# Altium PCB PCB-Fuente.V01.R00.PcbDoc
Units mm, origin at the board's own origin, x right, y up, seen from the top; angles counter-clockwise.
Board outline 60 x 73 mm, 4 copper layers (Top Layer, Ground, Power, Bottom Layer), stack 1.576 mm thick; 78 components, 38 nets, 217 pads, 1007 vias.
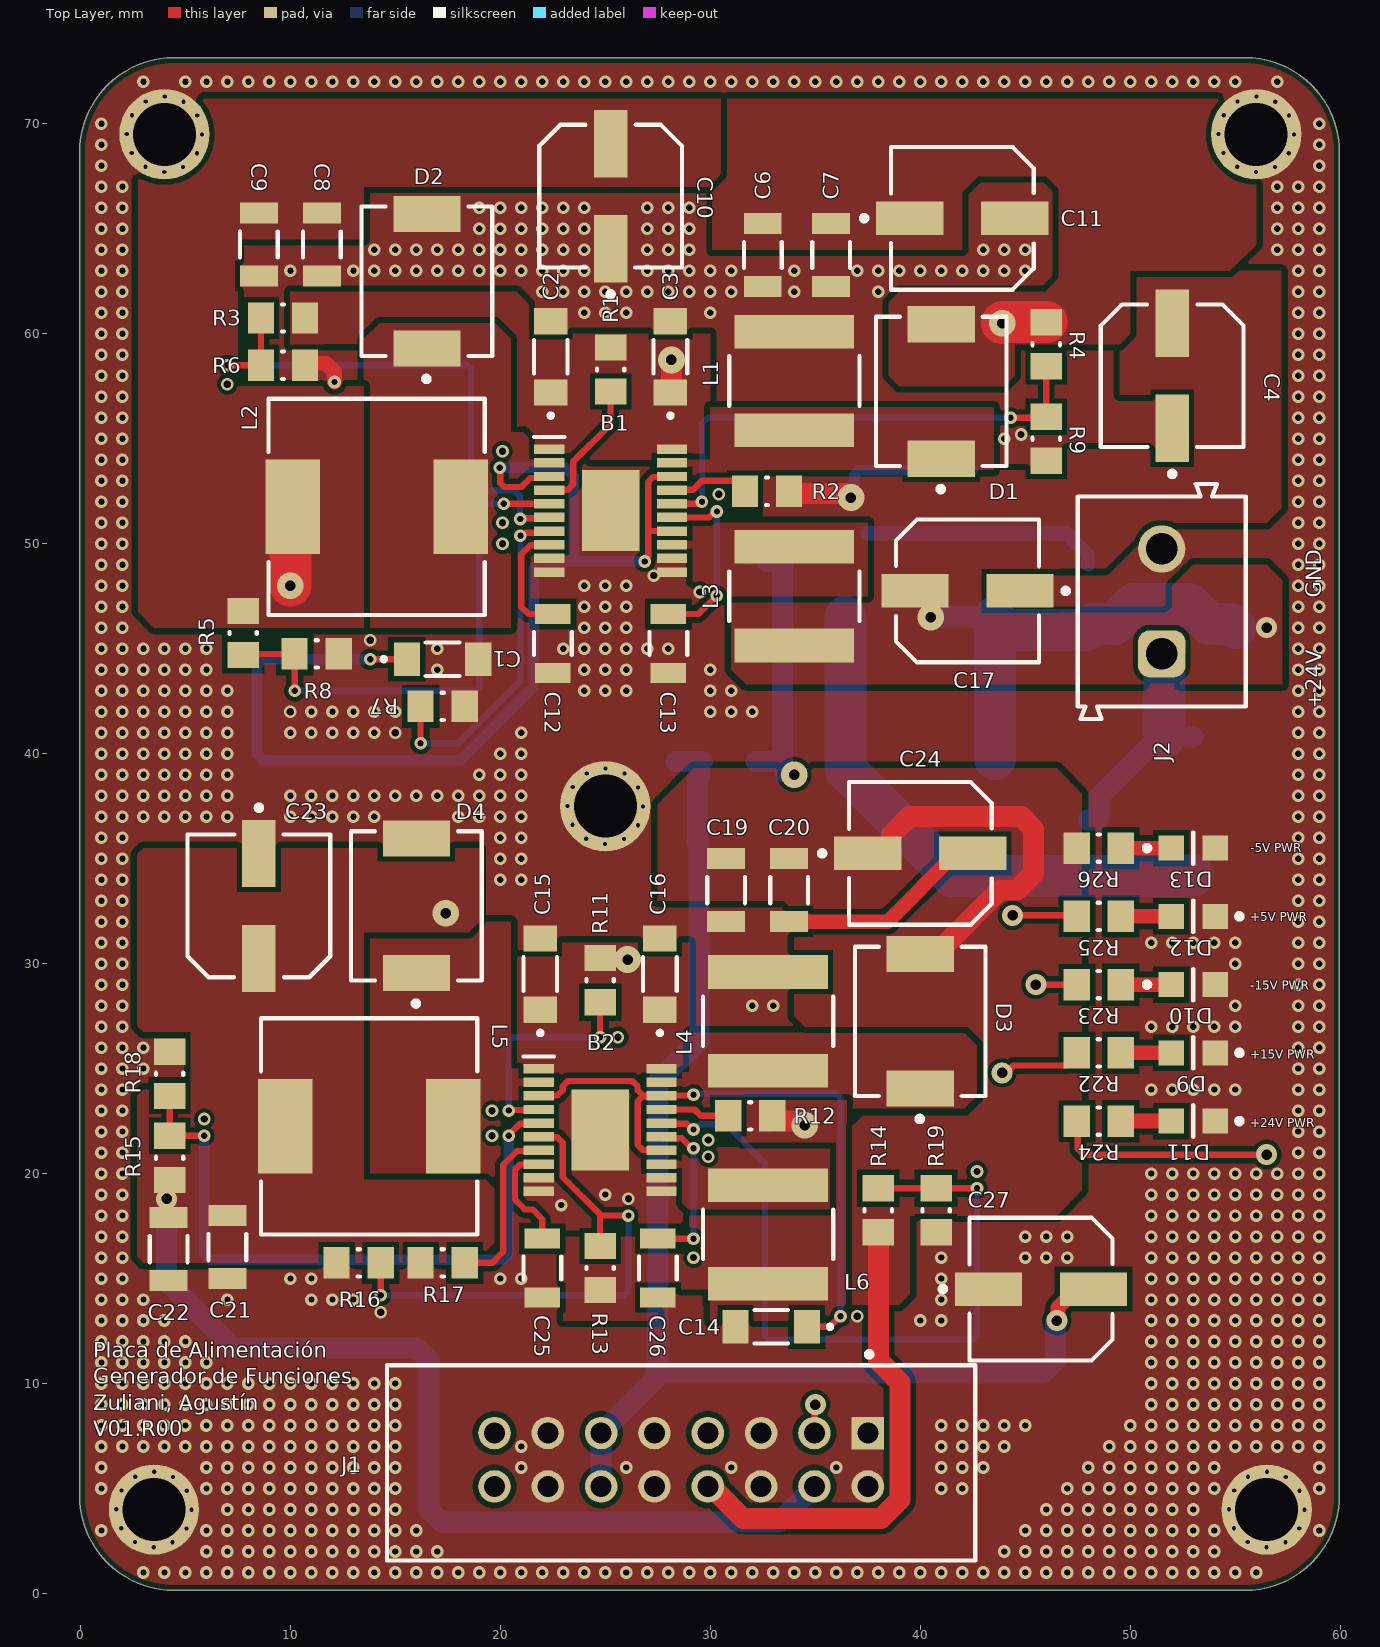
[diagram p0: Top Layer view]
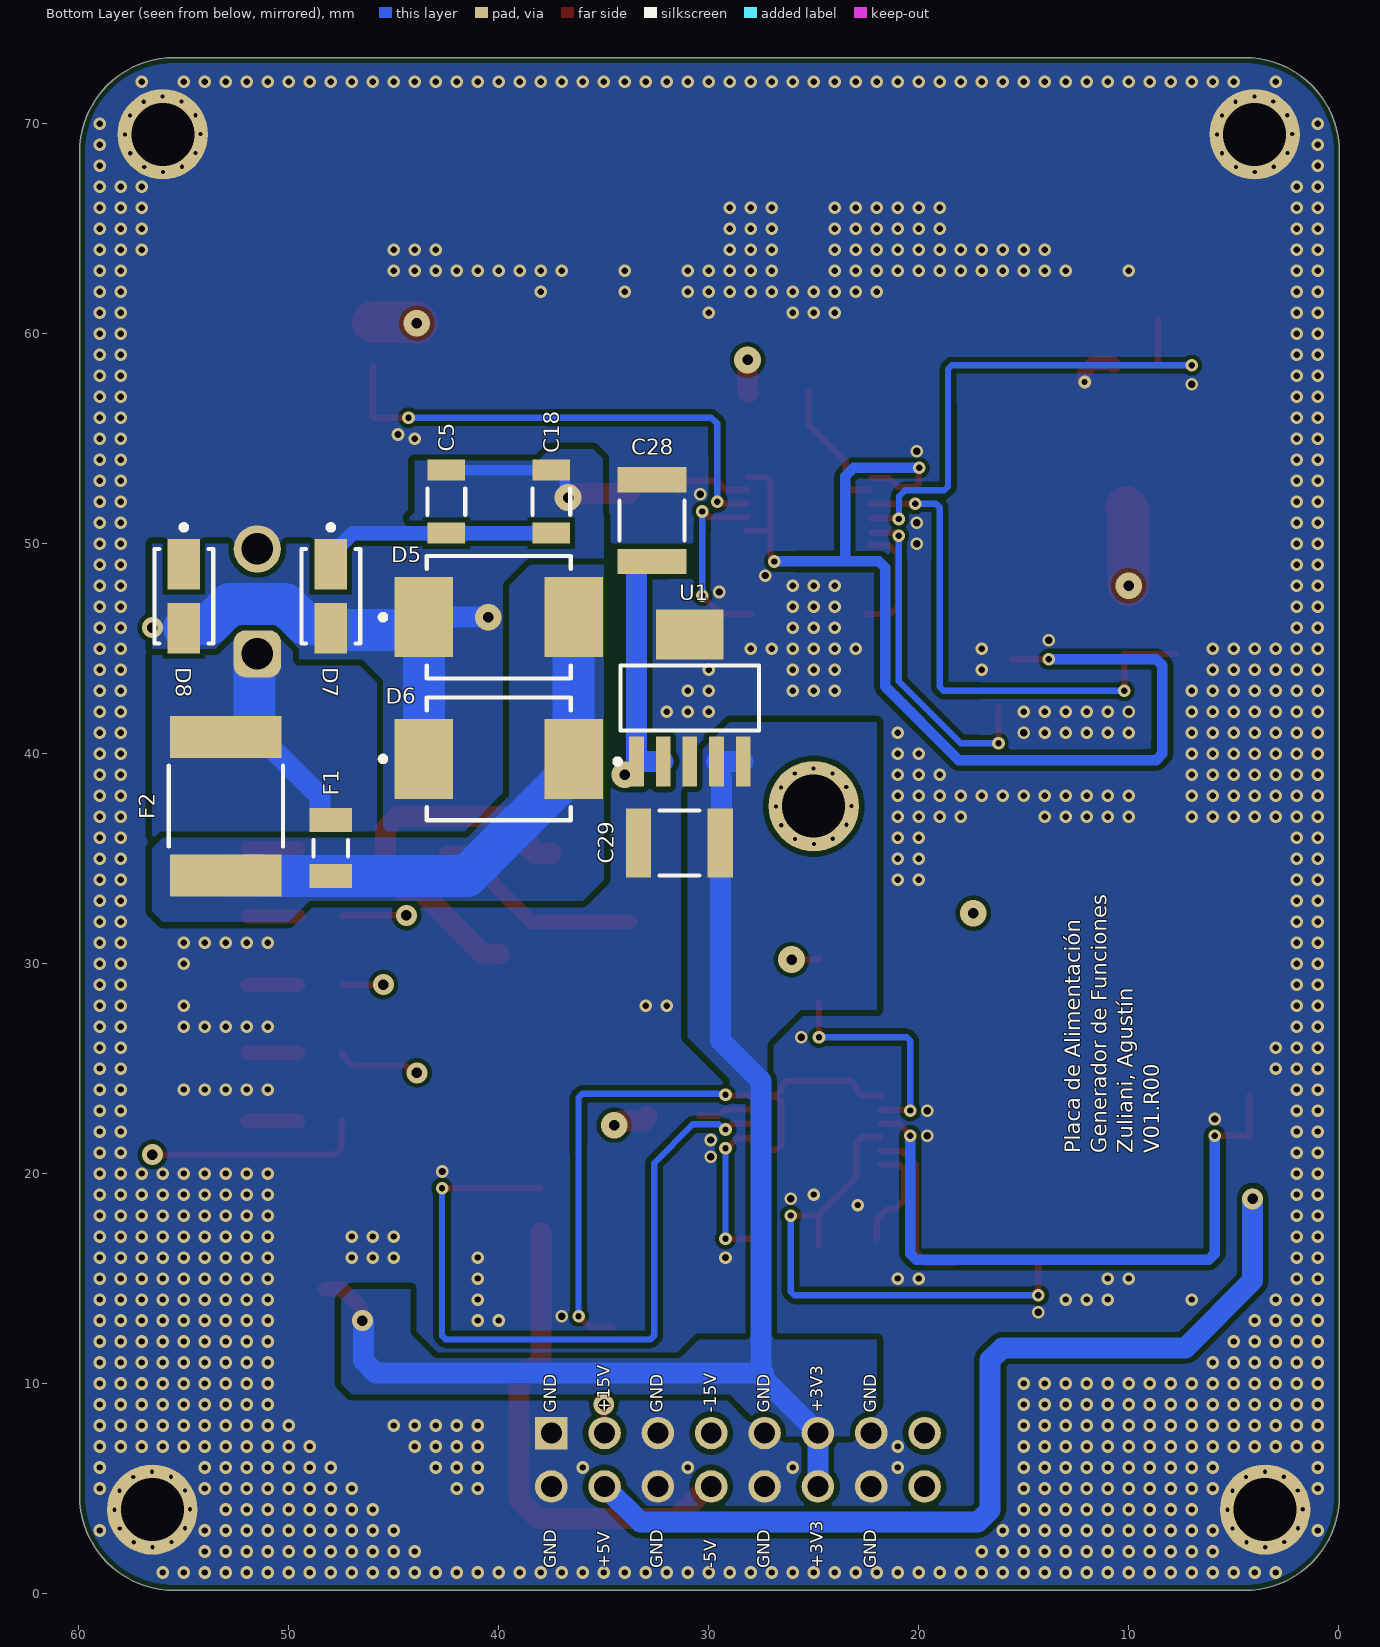
[diagram p1: Bottom Layer view, seen from below]
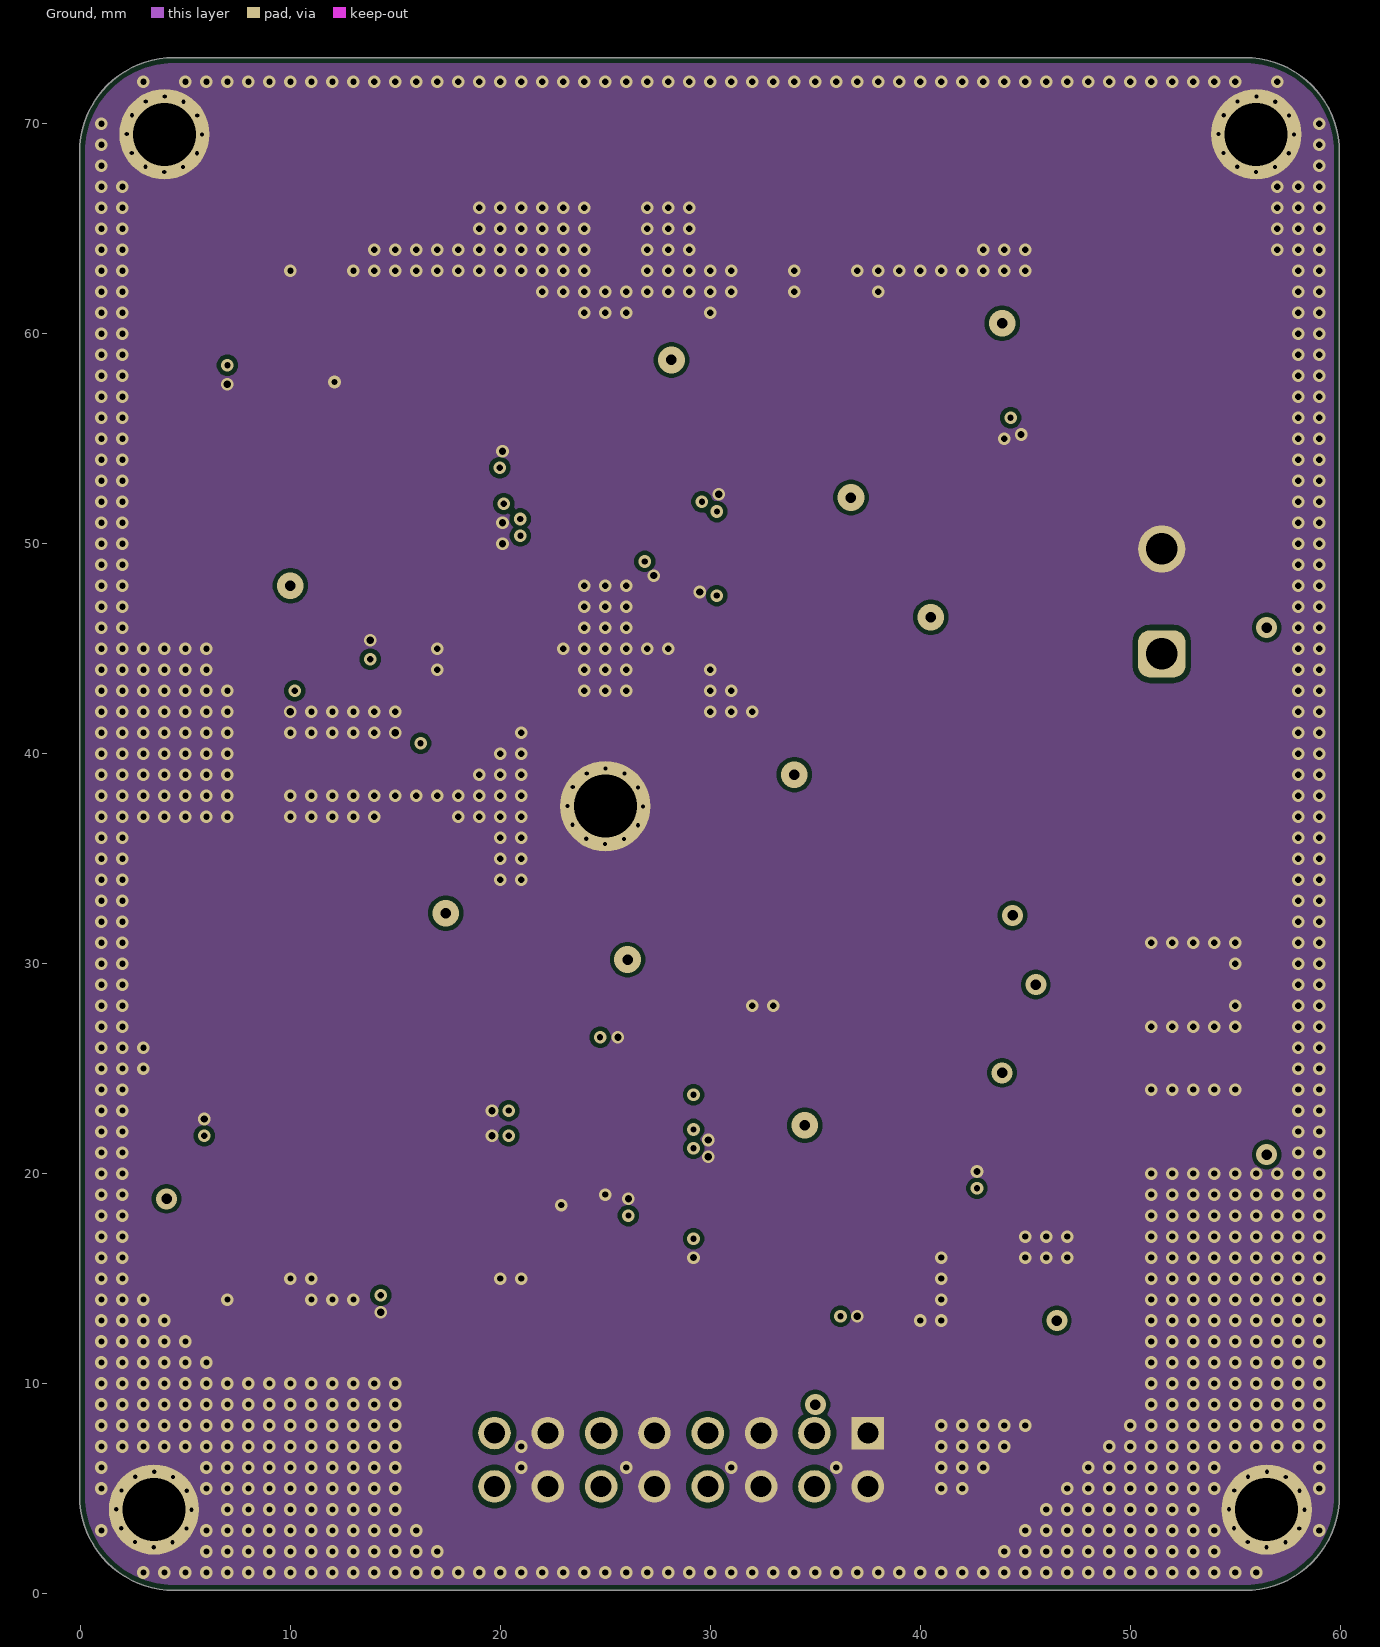
[diagram p2: Ground]
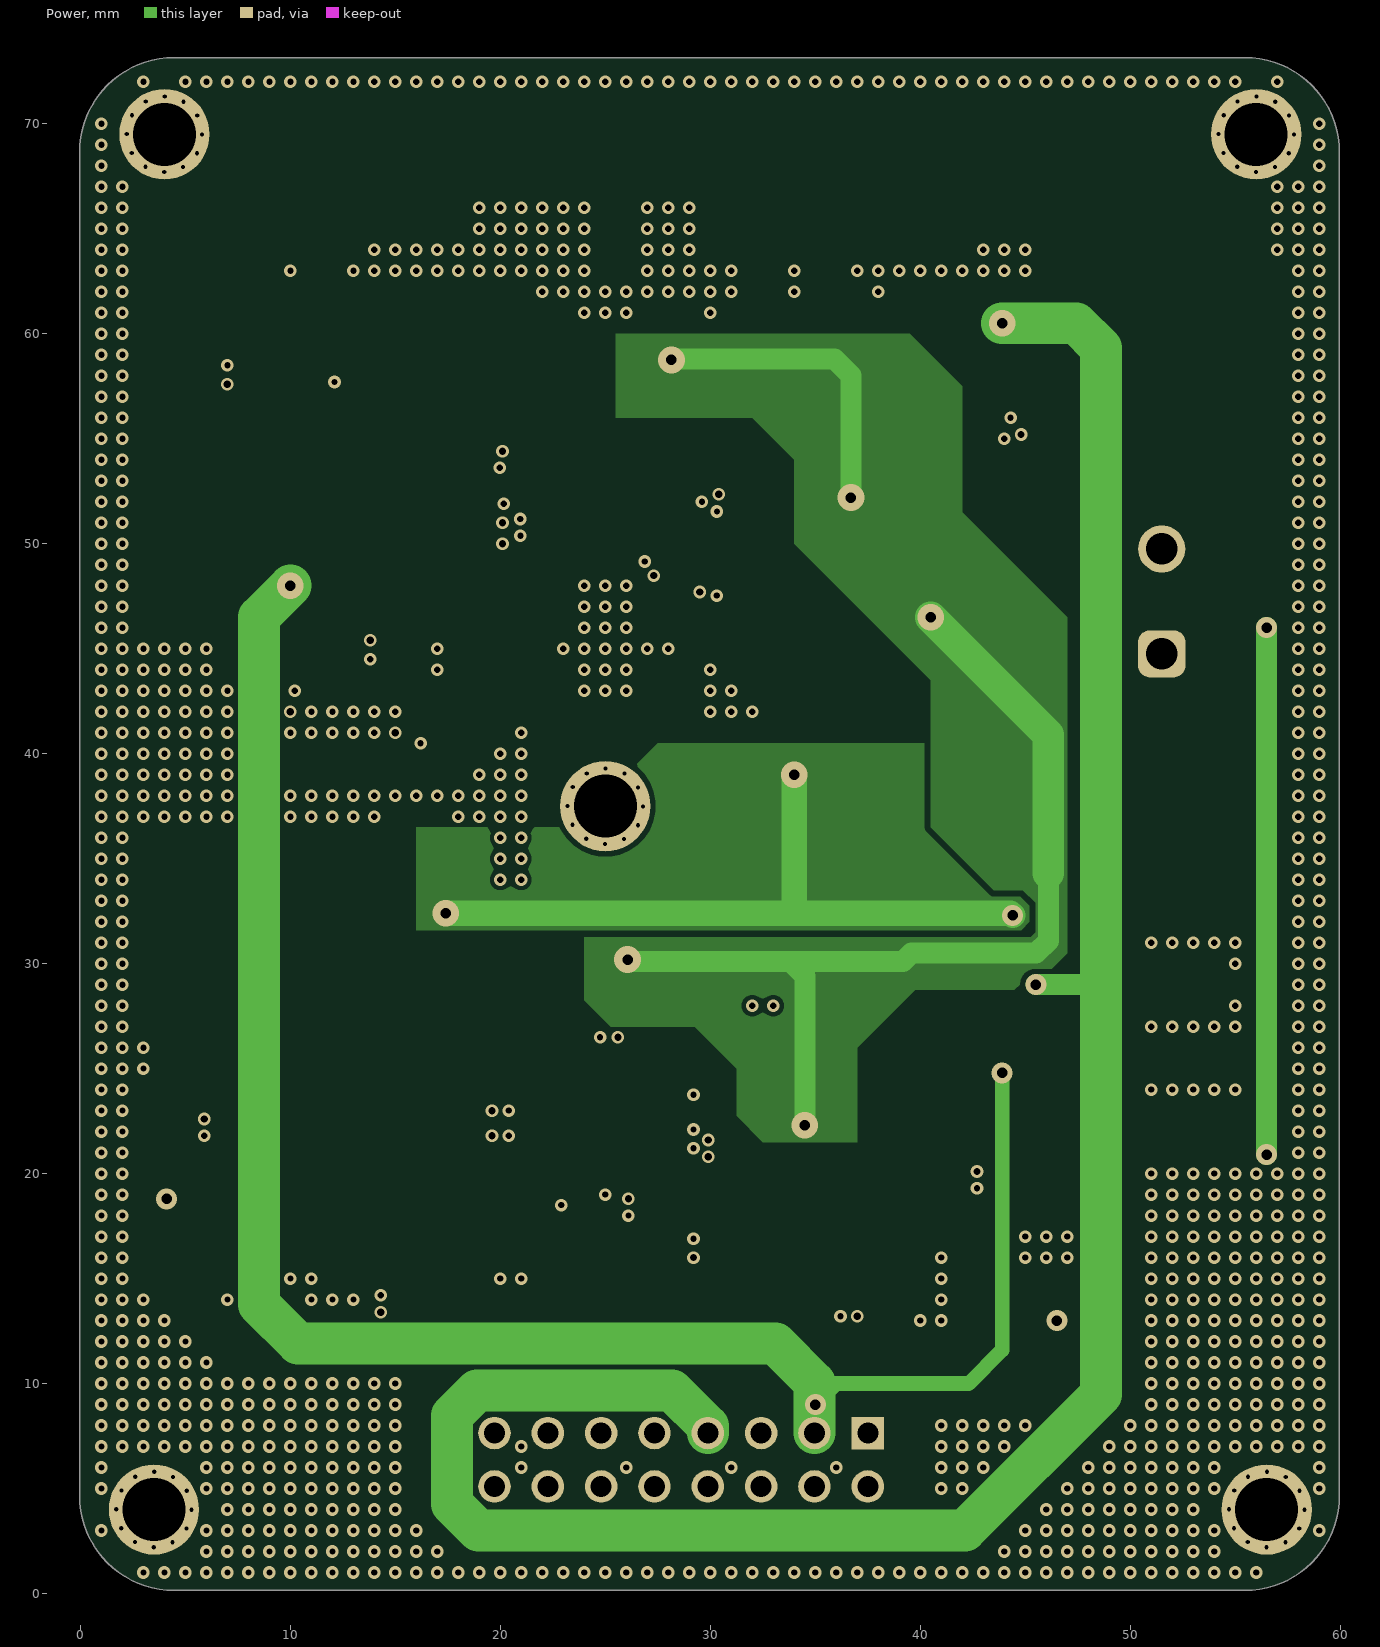
[diagram p3: Power]
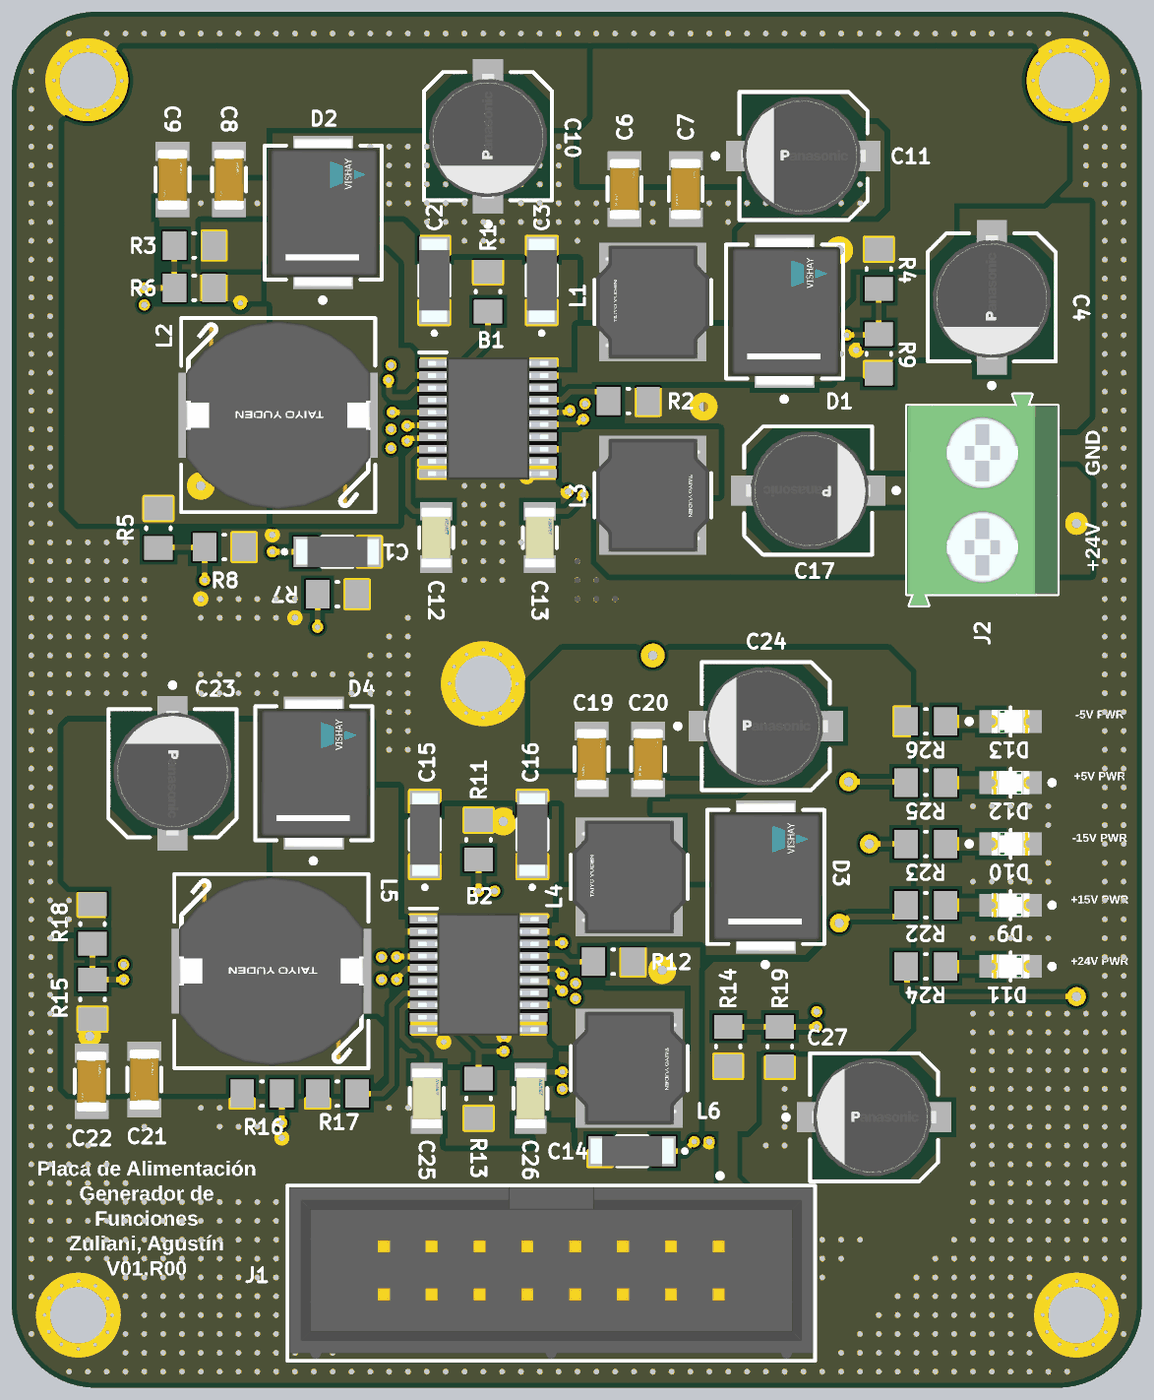
[diagram p4: 3D render of the assembled board from above, using the file's embedded part models]

## Layer stack, top to bottom
Top Solder: solder mask 0.0102, Solder Resist, Dk 3.5
Top Layer: signal copper 0.035
Dielectric 2: prepreg 0.203, PP-006, Dk 4.4
Ground: signal copper 0.035
Dielectric 1: dielectric 1.03, FR-4, Dk 4.6
Power: signal copper 0.035
Dielectric 3: prepreg 0.203, PP-006, Dk 4.4
Bottom Layer: signal copper 0.035
Bottom Solder: solder mask 0.0102, Solder Resist, Dk 3.5

## Board outline
-0.038,4.65 -0.038,68.65 cw(c4.462,68.65) 4.462,73.15 55.462,73.15 cw(c55.462,68.65) 59.962,68.65 59.962,4.65 cw(c55.462,4.65) 55.462,0.15 4.462,0.15 cw(c4.462,4.65)

## Design rules (kind name [scope] priority, off if disabled: settings)
BoardOutlineClearance [not (OnLayer('Top Overlay'))] p1: gap=0.254 ignorepadtopadclearanceinfootprint=FALSE except(0: Arc-SplitContinuation Track-SplitContinuation SMDPad-SplitContinuation THPad-SplitContinuation Via-SplitContinuation Fill-SplitContinuation Poly-SplitContinuation Region-SplitContinuation Text-SplitContinuation)
Clearance [All] p1: gap=0.254 ignorepadtopadclearanceinfootprint=FALSE except(0: Arc-Hole Track-Hole SMDPad-Hole THPad-Hole Via-Hole Fill-Hole Poly-Hole Region-Hole Text-Hole; 0.152: Arc-SMDPad Track-SMDPad SMDPad-SMDPad; 0.2: Arc-Arc Arc-Track Arc-Via Track-Track Track-Via SMDPad-Via THPad-Via Via-Via Via-Fill Via-Poly Via-Region; 0.3: Fill-Fill Fill-Poly Fill-Region Poly-Poly Poly-Region Region-Region)
HoleSize [All] p1: absolutevalues=TRUE maxlimit=5 minlimit=0.025 maxpercent=80.000 minpercent=20.000
HoleToHoleClearance [All] p1: gap=0.15 allowstackedmicrovias=TRUE
MinimumSolderMaskSliver [All] p1: minsoldermaskwidth=0
PolygonConnect [All] p1: connectstyle=Direct reliefconductorwidth=0.254 reliefentries=4 polygonreliefangle="90 Angle" airgapwidth=0.254
RoomDefinition Principal.V01.R00 [InComponentClass('Principal.V01.R00')] p1: confinementstyle=ConfineIn formatcopy=TRUE lockcomponents=FALSE outline 2,0.5 57,0.5 57,72.5 2,72.5
RoutingVias [All] p1: holewidth=0.711 width=1 viastyle="Through Hole" minholewidth=0.2 minwidth=0.4 maxholewidth=0.5 maxwidth=1.5
SilkToSilkClearance [All] p1: silktosilkclearance=0.1
SilkToSolderMaskClearance [IsPad] p1: minsilkscreentomaskgap=0.1 clearancetoexposedcopper=TRUE
SolderMaskExpansion [All] p1: expansion=0.102 istentingtop=FALSE
UnRoutedNet [All] p1: checkbadconnections=TRUE
Width [All] p1: maxlimit=2 minlimit=0.3 preferedwidth=0.5 minimp=50.000000 maximp=50.000000 favimp=50.000000
24 further rules are at their usual default settings.

## Components (designator, comment, footprint, x,y, rotation, side; value= is the part's Value field where it differs from the comment)
B1 "LT8471IFE#PBF" SOP65P640X120-21N 25.25,51.576 r0 top
B2 "LT8471IFE#PBF" SOP65P640X120-21N 24.75,22.076 r0 top
C1 "2.2uF 50V" MBASx31x 17.25,44.5 r0 top
C2 "2.2uF 50V" MBASx31x 22.4,58.9 r90 top
C3 "2.2uF 50V" MBASx31x 28.1,58.9 r90 top
C4 "47uF 35V" FP-FK-D-MFG 52,58 r90 top value=47uF
C5 "4.7uF 20V" FP-CC1206-1_25-MFG 42.5,52 r90 bottom value="1 uF"
C6 "4.7uF 20V" FP-CC1206-1_25-MFG 32.5,63.75 r270 top value="1 uF"
C7 "4.7uF 20V" FP-CC1206-1_25-MFG 35.75,63.75 r270 top value="1 uF"
C8 "4.7uF 20V" FP-CC1206-1_25-MFG 11.5,64.25 r90 top value="1 uF"
C9 "4.7uF 20V" FP-CC1206-1_25-MFG 8.5,64.25 r90 top value="1 uF"
C10 "47uF 35V" FP-FK-D-MFG 25.25,66.55 r90 top value=47uF
C11 "47uF 35V" FP-FK-D-MFG 42,65.5 r0 top value=47uF
C12 "100nF 50V" FP-C1206C-EB-MFG 22.5,45.25 r270 top value="0.10 μF"
C13 "100nF 50V" FP-C1206C-EB-MFG 28,45.25 r270 top value="0.10 μF"
C14 "2.2uF 50V" MBASx31x 32.9,12.7 r180 top
C15 "2.2uF 50V" MBASx31x 21.9,29.5 r90 top
C16 "2.2uF 50V" MBASx31x 27.6,29.5 r90 top
C17 "47uF 35V" FP-FK-D-MFG 42.25,47.75 r180 top value=47uF
C18 "4.7uF 20V" FP-CC1206-1_25-MFG 37.5,52 r90 bottom value="1 uF"
C19 "4.7uF 20V" FP-CC1206-1_25-MFG 30.75,33.5 r270 top value="1 uF"
C20 "4.7uF 20V" FP-CC1206-1_25-MFG 33.75,33.5 r270 top value="1 uF"
C21 "4.7uF 20V" FP-CC1206-1_25-MFG 7,16.5 r90 top value="1 uF"
C22 "4.7uF 20V" FP-CC1206-1_25-MFG 4.2,16.4 r90 top value="1 uF"
C23 "47uF 35V" FP-FK-D-MFG 8.5,32.75 r270 top value=47uF
C24 "47uF 35V" FP-FK-D-MFG 40,35.25 r0 top value=47uF
C25 "100nF 50V" FP-C1206C-EB-MFG 22,15.5 r270 top value="0.10 μF"
C26 "100nF 50V" FP-C1206C-EB-MFG 27.5,15.5 r270 top value="0.10 μF"
C27 "47uF 35V" FP-FK-D-MFG 45.75,14.5 r0 top value=47uF
C28 "10uF 25V" CAPC1812(4532)280_L 32.7,51.1 r270 bottom value=10uF
C29 "10uF 25V" CAPC1812(4532)280_L 31.4,35.75 r180 bottom value=10uF
D1 "SL43-E3/57T" FP-95402-MFG 41,57.25 r90 top
D2 "SL43" FP-95402-MFG 16.5,62.5 r90 top
D3 "SL43-E3/57T" FP-95402-MFG 40,27.25 r90 top
D4 "SL43" FP-95402-MFG 16,32.75 r90 top
D5 "MBRS360T3G" ONSC-SMC-2-403-03_V 40,46.5 r180 bottom
D6 "MBRS360T3G" ONSC-SMC-2-403-03_V 40,39.75 r180 bottom
D7 "SMAJ24CA" VISH-DO-214AC-2_N 48,47.5 r270 bottom
D8 "SMAJ24CA" VISH-DO-214AC-2_N 55,47.5 r270 bottom
D9 "PWR +15V" FP-SML-LX0805UWC-TR-MFG 53,25.75 r180 top
D10 "PWR +15V" FP-SML-LX0805UWC-TR-MFG 53,29 r0 top
D11 "PWR +15V" FP-SML-LX0805UWC-TR-MFG 53,22.5 r180 top
D12 "PWR +15V" FP-SML-LX0805UWC-TR-MFG 53,32.25 r180 top
D13 "PWR +15V" FP-SML-LX0805UWC-TR-MFG 53,35.5 r0 top
F1 "0468001.NR" FP-0468-MFG 48,35.5 r270 bottom value=0.079Ω
F2 "2920L110/60MR" FP-2920L-MFG 53,37.5 r270 bottom value=0.12-0.41Ω
J1 "IDC-PLACA CONTROL" FP-SBH11-PBPC-D08-ST-BK-MFG 28.61,6.22 r180 top
J2 "INPUT 24V" 691111710002 51.5,47.25 r90 top
L1 "15uH" FP-NR6045-MFG 34,57.75 r90 top
L2 "10uH" FP-NR10050-MFG 14.11,51.75 r180 top
L3 "15uH" FP-NR6045-MFG 34,47.5 r270 top
L4 "15uH" FP-NR6045-MFG 32.75,27.25 r90 top
L5 "10uH" FP-NR10050-MFG 13.75,22.25 r180 top
L6 "15uH" FP-NR6045-MFG 32.75,17.1 r270 top
R1 "100K 5%" RESC0805(2012)_M 25.25,58.3 r90 top value="124000.00 Ohm"
R2 "100K 5%" RESC0805(2012)_M 32.7,52.5 r180 top value="124000.00 Ohm"
R3 "68K7 1%" RESC0805(2012)_M 9.65,60.75 r0 top value="124000.00 Ohm"
R4 "180K 1%" RESC0805(2012)_M 46,59.5 r90 top value="124000.00 Ohm"
R5 "180K 1%" RESC0805(2012)_M 7.75,45.75 r90 top value="124000.00 Ohm"
R6 "4K75 1%" RESC0805(2012)_M 9.65,58.5 r180 top value="124000.00 Ohm"
R7 "170K 1%" RESC0805(2012)_M 17.25,42.25 r180 top value="124000.00 Ohm"
R8 "10K 1%" RESC0805(2012)_M 11.25,44.75 r180 top value="124000.00 Ohm"
R9 "10K 1%" RESC0805(2012)_M 46,55 r90 top value="124000.00 Ohm"
R11 "100K 5%" RESC0805(2012)_M 24.75,29.213 r90 top value="124000.00 Ohm"
R12 "100K 5%" RESC0805(2012)_M 31.9,22.75 r180 top value="124000.00 Ohm"
R13 "68K7 1%" RESC0805(2012)_M 24.75,15.5 r270 top value="124000.00 Ohm"
R14 "180K 1%" RESC0805(2012)_M 38,18.25 r270 top value="124000.00 Ohm"
R15 "316K 1%" RESC0805(2012)_M 4.25,20.75 r270 top value="124000.00 Ohm"
R16 "4K75 1%" RESC0805(2012)_M 13.25,15.75 r0 top value="124000.00 Ohm"
R17 "170K 1%" RESC0805(2012)_M 17.25,15.75 r0 top value="124000.00 Ohm"
R18 "59K 1%" RESC0805(2012)_M 4.25,24.75 r270 top value="124000.00 Ohm"
R19 "10K 1%" RESC0805(2012)_M 40.75,18.25 r90 top value="124000.00 Ohm"
R22 "1K2 5%" RESC0805(2012)_M 48.5,25.75 r0 top value="124000.00 Ohm"
R23 "1K2 5%" RESC0805(2012)_M 48.5,29 r0 top value="124000.00 Ohm"
R24 "2K2 5%" RESC0805(2012)_M 48.5,22.5 r0 top value="124000.00 Ohm"
R25 "1K2 5%" RESC0805(2012)_M 48.5,32.25 r0 top value="124000.00 Ohm"
R26 "1K2 5%" RESC0805(2012)_M 48.5,35.5 r0 top value="124000.00 Ohm"
U1 "TPS7A4533DCQT" DCQ0006A_M 30.9,42.65 r90 bottom

## Footprints (in the part's own frame and the unit in brackets; to place one, negate y for a bottom-side part, rotate by r counter-clockwise, add the part's x,y. Pads: shape width x height; smd on the part's side, far side on the other; paste and mask are expansions set on the pad)
691111710002 [mm] "5,00mm - modular - green - Horizontal entry with pressure clamp - 10,0mm height - 02p"
  rrect50% 2.25x2.25 hole 1.5: 1(-2.5,0)
  round 2.25 hole 1.5: 2(2.5,0)
  silkscreen extent -5.6,-4 5.6,4, body extent -5.6,-4 5.6,4, height 11.05
CAPC1812(4532)280_L [mm] "Chip Capacitor, Body 4.5x3.2mm, Height 2.8mm, IPC High Density"
  rect 1.2x3.3 smd: 1(-1.95,0) 2(1.95,0)
  silkscreen extent -0.95,-1.55 0.95,1.55, body extent -2.4,-1.7 2.4,1.7, height 2.8
DCQ0006A_M [mm] "SOT223, 6-Leads, Body 6.55x3.55mm, Pitch 1.27mm, IPC Low Density"
  rrect14% 2.4x0.7 smd: 1(-3.025,2.54) 2(-3.025,1.27) 3(-3.025,0) 4(-3.025,-1.27) 5(-3.025,-2.54)
  rrect4% 2.4x3.2 smd: 6(3.025,0)
  silkscreen extent -3.15,-3.3 1.55,3.57, body extent -3.48,-3.25 3.48,3.25, height 1.64
FP-0468-MFG [mil]
  rect 45x80 smd paste+0 mask+0: 1(-52.5,0) 2(52.5,0)
  silkscreen extent -15,-32 15,32, body extent -63,-30 63,30, height 23
FP-2920L-MFG [mm]
  rect 2x5.3 smd paste+0 mask+0: 1(-3.3,0) 2(3.3,0)
  silkscreen extent -1.92,-2.72 1.92,2.72, body extent -3.68,-2.56 3.68,2.56, height 2
FP-95402-MFG [mm]
  rect 1.72x3.2 smd paste+0 mask+0: 1(-3.205,0) 2(3.205,0)
  silkscreen extent -4.77,-3.11 3.55,3.11, body extent -4.17,-3.21 4.17,3.21, height 0.25
FP-C1206C-EB-MFG [mm]
  rect 0.95x1.7 smd paste+0 mask+0: 1(-1.4,0) 2(1.4,0)
  silkscreen extent -0.55,-0.9 0.55,0.9, body extent -2,-1 2,1, height 0.25
FP-CC1206-1_25-MFG [mm]
  rect 1x1.8 smd paste+0 mask+0: 1(-1.5,0) 2(1.5,0)
  silkscreen extent -0.63,-0.9 0.63,0.9, body extent -1.6,-0.8 1.6,0.8, height 1.45
FP-FK-D-MFG [mm]
  rect 3.2x1.6 smd paste+0 mask+0: 1(-2.5,0) 2(2.5,0)
  silkscreen extent -4.8,-3.4 3.4,3.4, body extent -4.2,-3.5 4.2,3.5, height 0.25
FP-NR6045-MFG [mm]
  rect 1.6x5.7 smd paste+0 mask+0: 1(-2.35,0) 2(2.35,0)
  silkscreen extent -1.17,-3.1 1.17,3.1, body extent -3.25,-3.2 3.25,3.2, height 0.25
FP-NR10050-MFG [mm]
  rect 2.6x4.5 smd paste+0 mask+0: 1(-4,0) 2(4,0)
  silkscreen extent -5.15,-5.15 5.15,5.15, body extent -5.4,-5.25 5.4,5.25, height 0.25
FP-SBH11-PBPC-D08-ST-BK-MFG [mm]
  rect 1.55x1.55 hole 1 paste-2539.97 mask+0: 1(-8.89,-1.42)
  round 1.55 hole 1 paste-2539.97 mask+0: 2(-8.89,1.12) 3(-6.35,-1.42) 4(-6.35,1.12) 5(-3.81,-1.42) 6(-3.81,1.12) 7(-1.27,-1.42) 8(-1.27,1.12) 9(1.27,-1.42) 10(1.27,1.12) 11(3.81,-1.42) 12(3.81,1.12) 13(6.35,-1.42) 14(6.35,1.12) 15(8.89,-1.42) 16(8.89,1.12)
  silkscreen extent -14.01,-5.29 14.01,4.65, body extent -14.11,-4.75 14.11,4.75, height 0.25
FP-SML-LX0805UWC-TR-MFG [mm]
  rect 1.2x1.2 smd paste+0 mask+0: 1(-1.05,0) 2(1.05,0)
  silkscreen extent -2.33,-0.75 0,0.75, body extent -1.75,-0.85 1.75,0.85, height 0.25
MBASx31x [mm]
  rect 1.25x1.6 smd: 1(-1.7,0) 2(1.7,0)
  silkscreen extent -2.9,-0.8 0.8,0.8, body extent -2.2,-0.8 2.2,0.8, height 1.7
ONSC-SMC-2-403-03_V [mil] "Molded, 2-Leads, Body 6.86x5.84mm"
  rect 110x150 smd: 1(-140.49,0) 2(140.49,0)
  silkscreen extent -222,-115 135,115, body extent -135,-115 135,115, height 99
RESC0805(2012)_M [mm] "Chip Resistor, Body 2.0x1.3mm, IPC Low Density"
  rect 1.25x1.5 smd: 1(-1.05,0) 2(1.05,0)
  silkscreen extent -0.05,-0.65 0.05,0.65, body extent -1.1,-0.67 1.1,0.67, height 0.7
SOP65P640X120-21N [mm]
  rect 1.45x0.45 smd: 1(-2.925,2.925) 2(-2.925,2.275) 3(-2.925,1.625) 4(-2.925,0.975) 5(-2.925,0.325) 6(-2.925,-0.325) 7(-2.925,-0.975) 8(-2.925,-1.625) 9(-2.925,-2.275) 10(-2.925,-2.925) 11(2.925,-2.925) 12(2.925,-2.275) 13(2.925,-1.625) 14(2.925,-0.975) 15(2.925,-0.325) 16(2.925,0.325) 17(2.925,0.975) 18(2.925,1.625) 19(2.925,2.275) 20(2.925,2.925)
  rect 2.74x3.86 smd: 21(0,0)
  silkscreen extent -3.65,3.5 -2.2,3.5, body extent -3.2,-3.25 3.2,3.25, height 1.2
VISH-DO-214AC-2_N [mm] "DO-214AC, 2-Leads, Body 4.5x2.79mm, IPC Medium Density"
  rect 2.4x1.55 smd: 1(-1.525,0) 2(1.525,0)
  silkscreen extent -3.4,-1.4 2.25,1.4, body extent -2.25,-1.4 2.25,1.39, height 2.29

## Part data
B1 B2: "DC/DC CONVERTER, MULTITOPOLOGY, 50V, TSSOP-20; Supply Voltage:50V; No. of Step-Down DC - DC Converters:2; No. of LDO Regulators:-; No. of Regulated Outputs:2; Digital IC Case:TSSOP; No. of Pins:20Pins; Operating Temperature Min:-40CRoHS Compliant: Yes", Manufacturer_Name="Analog Devices", Mouser Part Number=584-LT8471IFE#PBF, Datasheet Link=https://www.analog.com/media/en/technical-documentation/data-sheets/8471fd.pdf, Geometry.Height=1.2mm, Manufacturer_Part_Number=LT8471IFE#PBF, Mouser Price/Stock=https://www.mouser.co.uk/ProductDetail/Analog-Devices/LT8471IFEPBF?qs=hVkxg5c3xu%2FiDctk9AXMtQ%3D%3D
C1 C2 C3 C14 C15 C16: library part MBASU31LSB7225KTNA01, "Capacitor", Manufacturer_Name="TAIYO YUDEN", Datasheet Link=https://ds.yuden.co.jp/TYCOMPAS/or/detail?pn=MBASU31LSB7225KTNA01, Height=1.6mm, Manufacturer_Part_Number=MBASU31LSB7225KTNA01
C4 C10 C11 C17 C23 C24 C27: library part CMP-05427-000002-1, "CAP ALUM 47UF 20% 35V SMD", Capacitance=47uF, Leakage Current=16.45uA, Manufacturer=Panasonic, Manufacturer Part Number=EEE-FK1V470P, Package=FK-D, Ripple Current=240mA, Temperature="-55°C to +105°C", Temperature Range High=+105°C, Temperature Range Low=-55°C, Tolerance=20%, Voltage Rating=35V, Automotive=Yes, Automotive Grade="Grade 2", Category=Cap, ComponentLink2Description=Datasheet, ComponentLink2URL=https://industrial.panasonic.com/cdbs/www-data/pdf/RDE0000/ABA0000C1181.pdf, Device Class L1="Passive Components", Device Class L2=Capacitors, Device Class L3="Aluminum Electrolytic Capacitors", Digikey Description="CAP ALUM 47UF 20% 35V SMD", Dissipation Factor=12%, Esr=0.36Ω, Height=6.1mm, Lead Free=Yes, Life=2000Hours, Material=Aluminum, Mouser Description="Capacitor Aluminum Electrolytic 47uF 35 Volt 20% (6.3 X 5.8mm) Surface Mount 240mA 2000h 105C Automotive", Octopart=https://octopart.com/eeefk1v470p-panasonic-4642848, RoHS=TRUE
C5 C6 C7 C8 C9 C18 C19 C20 C21 C22: library part CMP-03422-001171-1, "CAP CER 1UF 10V X7R 1206", Capacitance="1 uF", Manufacturer=Yageo, Manufacturer Part Number=CC1206KKX7R6BB105, Package=CC1206-1.25, Temperature="-55°C to +125°C", Temperature Characteristic=X7R, Temperature Coefficient=15%, Temperature Range High=+125°C, Temperature Range Low=-55°C, Tolerance=0.1, Voltage Rating="10 V", Automotive=No, Automotive Grade=NA, Category=Cap, ComponentLink2Description=Datasheet, ComponentLink2URL=http://www.yageo.com/documents/recent/UPY-NP0X7R_HV_1KV-to-3KV_11.pdf, Device Class L1="Passive Components", Device Class L2=Capacitors, Device Class L3="Ceramic Capacitors", Digikey Description="CAP CER 1UF 10V X7R 1206", Footprint Url=http://www.yageo.com/exep/pages/download/literatures/UPY-C_GEN_24.pdf, Height=1.45mm, Lead Free=Yes, Material=Ceramic, Mouser Description="Multilayer Ceramic Capacitors MLCC - SMD/SMT 1.0uF 10V X7R 10%", Octopart=https://octopart.com/cc1206kkx7r6bb105-yageo-21769912, RoHS=TRUE
C12 C13 C25 C26: library part CMP-03020-005759-1, "CAP CER 0.1UF 50V X7R 1206", Capacitance="0.10 μF", Manufacturer=KEMET, Manufacturer Part Number=C1206C104K5RACAUTO, Package=C1206C-EB, Temperature="-55°C to +150°C", Temperature Characteristic=X7R, Temperature Coefficient=15%, Temperature Range High=+150°C, Temperature Range Low=-55°C, Tolerance=0.1, Voltage Rating="50 V", Automotive=Yes, Automotive Grade="Grade 0", Category=Cap, ComponentLink2Description=Datasheet, ComponentLink2URL=https://content.kemet.com/datasheets/KEM_C1007_X8R_ULTRA_150C_SMD.pdf, Device Class L1="Passive Components", Device Class L2=Capacitors, Device Class L3="Ceramic Capacitors", Digikey Description="CAP CER 0.1UF 50V X7R 1206", Height=0.88mm, Ipc Land Pattern Name=CAPC320160X78, Lead Free=Yes, Material=Ceramic, Mouser Description="Multilayer Ceramic Capacitors MLCC - SMD/SMT 0.1uF 50volts 10% X7R AUTO", Octopart=https://octopart.com/c1206c104k5racauto-kemet-12595586, RoHS=TRUE
C28 C29: library part CMP-1040-01657-2, "CAP 10uF 25V ±20% 1812 (4532 Metric) Thickness 2.8mm SMD", Case-EIA=1812, Case-Metric=4532, Rated Voltage="25 V", Tolerance=Â±20%, Max Thickness="2.8 mm", Technology=SMT
D1 D2 D3 D4: library part CMP-02539-000070-1, "DIODE SCHOTTKY 30V 4A DO214AB", Average Rectified Current=4A, Case/Package=DO-214AB, Forward Current=8A, Forward Voltage=470mV, Max Forward Surge Current (Ifsm)=150A, Max Operating Temperature=125°C, Max Repetitive Reverse Voltage (Vrrm)=30V, Max Reverse Current=500uA, Min Operating Temperature=-55°C, Package Quantity=1, Current Rating=4A, Element Configuration=Single, Height=0.095inch, Lead Free="Lead Free", Length=0.279inch, Max Reverse Voltage (DC)=30V, Mount="Surface Mount", Number of Pins=2, Output Current=4A, Packaging="Tape and Reel", Peak Non-Repetitive Surge Current=150A, Polarity=Standard, Voltage Rating (DC)=30V, Width=0.245inch
D5 D6: library part CMP-1055-00394-1, "Schottky Power Rectifier, 2-Pin SMC, Pb-Free, Tape and Reel", Manufacturer="On Semiconductor", ComponentLink1Description="Manufacturer URL", ComponentLink1URL=http://www.onsemi.com/, ComponentLink2Description=Datasheet, ComponentLink2URL=http://www.onsemi.cn/pub_link/Collateral/MBRS360T3-D.PDF, ComponentLink3Description="Package Specification", ComponentLink3URL=http://www.onsemi.com/pub_link/Collateral/403-03.PDF, Configuration=Single, DatasheetVersion="Rev. 8", IFSM Max (A)=125, Mounting Technology="Surface Mount", PackageDescription="2-Pin Small Molded Package, J-Bend Lead, Body 5.845 x 6.855 mm", PackageReference=SMC-2-403-03, PackageVersion="Rev. E, 08/2005", Packing="Tape and Reel", PartNumber=MBRS360T3G, RoHS=TRUE
D7 D8: library part CMP-0548-00269-2, "Transient Voltage Suppressor, 6.40 to 231 V, 24 V Stand-off Voltage, Bi-Directional, -55 to 155 degC, 2-pin DO-214AC, Pb-Free, Tape and Reel", Manufacturer="Vishay Semiconductor", Operating Junction and Storage Temperature Range="-55 to 150 degC", PartNumber=SMAJ24CA-E3/5A, ComponentLink1Description="Manufacturer URL", ComponentLink1URL=http://www.vishay.com/, ComponentLink2Description=Datasheet, ComponentLink2URL=http://www.vishay.com/docs/88390/smaj50a.pdf, ComponentLink3Description="Package Specification", ComponentLink3URL=http://www.vishay.com/docs/88390/smaj50a.pdf, DatasheetVersion=12/8/2013, ID (uA)=2, IFSM="40 A", Mounting Technology="Surface Mount", PackageDescription="2-Pin DO-214AC (SMA), Body 4.245 x 2.665 mm", PackageReference=DO-214AC-2, Packing="Tape and Reel", PPPM (W)="400, 300", RoHS=TRUE, VBR Bi-Directional (V)="6.4 to 231", VWM (V)=24
D9 D10 D11 D12 D13: library part CMP-00229-00139794-1, "SML-LX0805UWC-TR White LED, 0805 Diffused, Rectangle Lens SMD package", Case/Package=0805, Forward Current=20mA, Forward Voltage=3.5V, Illumination Color=White, Lens Color="Clear, Yellow", Max Operating Temperature=85°C, Min Operating Temperature=-40°C, Power Rating=120mW, Approvals="CSA, UL", Luminous Intensity=150mcd, Mount="Surface Mount", NexarPartId=139794, Number of LEDs=1, RoHS=Compliant, Viewing Angle=120°
F1: library part CMP-2000-05753-2, "FUSE BOARD MNT 1A 63VAC/VDC 1206", Fuse Current=1A, Fuse Interrupt Ac Current=50A, Fuse Voltage Drop=94.7mV, Manufacturer=Littelfuse, Max Fuse Ac Voltage=63V, Package=0468, Resistance=0.079Ω, Temperature="-55°C to +90°C", Temperature Range High=+90°C, Temperature Range Low=-55°C, Automotive=No, Category=Fuse, ComponentLink2Description=Datasheet, ComponentLink2URL=https://m.littelfuse.com/~/media/electronics/datasheets/fuses/littelfuse_fuse_468_datasheet.pdf.pdf, Device Class L1="Circuit Protection", Device Class L2=Fuses, Device Class L3=unset, Digikey Description="FUSE BOARD MNT 1A 63VAC/VDC 1206", Fuse Blow Speed=Slow, Fuse I2T=0.127A2Sec, Fuse Interrupt Dc Current=50A, Height=0.762mm, Lead Free=Yes, Manufacturer Part Number=0468001.NR, Max Fuse Dc Voltage=63V, Mouser Description="Surface Mount Fuses 1A Slo-Blo", Octopart=https://octopart.com/0468001.nr-littelfuse-566477, RoHS=TRUE, Voltage Rating=63V
F2: library part CMP-08606-000028-1, "PTC RESET FUSE 60V 1.1A 2920", Ambient Temperature Range High=+85°C, Ambient Temperature Range Low=-40°C, Current Rating=20A, Hold Current=1.1A, Manufacturer=Littelfuse, Package=2920L, Resistance=0.12-0.41Ω, Temperature="-40°C to +85°C", Trip Current=2.2A, Voltage Rating=60V, Automotive=No, Category=Fuse, ComponentLink2Description=Datasheet, ComponentLink2URL=https://m.littelfuse.com/~/media/electronics/datasheets/resettable_ptcs/littelfuse_ptc_2920l_datasheet.pdf.pdf, Device Class L1="Circuit Protection", Device Class L2="PTC Resettable Fuses", Device Class L3=unset, Digikey Description="PTC RESET FUSE 60V 1.1A 2920", Height=2mm, Lead Free=Yes, Manufacturer Part Number=2920L110/60MR, Octopart=https://octopart.com/2920l110%2F60mr-littelfuse-75250824, RoHS=TRUE, Temperature Range High=+85°C, Temperature Range Low=-40°C, Trip Time=0.5s
J1: library part CMP-25680-000019-1, "CONN HEADER VERT 16POS 2.54MM", Current Rating=3A, Manufacturer=Sullins, Manufacturer Part Number=SBH11-PBPC-D08-ST-BK, Package=0, Temperature="-40°C to +105°C", Temperature Range High=+105°C, Temperature Range Low=-40°C, Automotive=No, Category=Conn, ComponentLink2Description=Datasheet, ComponentLink2URL=https://drawings-pdf.s3.amazonaws.com/11091.pdf, Conn Gender=Male, Conn Orientation=Straight, Contact Material=Gold,Nickel, Device Class L1=Connectors, Device Class L2="Headers and Wire Housings", Device Class L3=unset, Digikey Description="CONN HEADER VERT 16POS 2.54MM", Height=9.3mm, Lead Free=Yes, Number Of Contacts=16, Number Of Rows=2, Octopart=https://octopart.com/sbh11-pbpc-d08-st-bk-sullins-12270491, Pitch=2.54mm, RoHS=TRUE, Standoff Height=0.3mm
J2: library part CMP-1502-03262-3, "111 Series 5MM Pitch Straight, Pcb Terminal Block, Through Hole, 2 Way", Case/Package=J, Color=Green, Current Rating=8A, Max Operating Temperature=105°C, Min Operating Temperature=-40°C, Voltage Rating=300V, Contact Material=Brass, Contact Plating=Tin, Height=14mm, Housing Material=Nylon, Lead Pitch=5mm, Length=7.6mm, Number Of Contacts=2, Number of Levels=1, Number of Pins=2, Number of Positions Per Level=2, Packaging=Box, Pitch=5.0038mm, REACH SVHC=Unknown, RoHS=Compliant, Stripping Length=-6mm, Termination=Screw, Width=11.2mm, Wire/Cable Gauge=26AWG
L1 L3 L4 L6: library part CMP-14484-001063-1, "Shielded Wirewound Inductor 15uH 20% 2.3A 91mΩ SMD", Case/Package=6045, Current Rating=1.9A, DC Resistance (DCR)=91mR, Inductance Tolerance=20%, Max Operating Temperature=125°C, Min Operating Temperature=-25°C, Package Quantity=1500, Resistor Type=Wirewound, Saturation Current=2.5A, Self Resonant Frequency=10MHz, Test Frequency=100kHz, Core Material=Ferrite, Depth=6.2mm, Halogen Free="Halogen Free", Height=4.5mm, Height - Seated (Max)=0.177inch, Inductance=15uH, Lead Free="Lead Free", Lead Pitch=4.7mm, Length=6mm, Max DC Current=1.9A, Mount="Surface Mount", Number of Pins=2, Packaging="Tape and Reel", Radiation Hardening=No, RMS Current (Irms)=1.9A, RoHS Compliant=Yes, Series=NRS, Shielding=Shielded, Termination=SMD/SMT, Tolerance=20%, Width=6mm
L2 L5: library part CMP-14484-000424-1, "Inductor Power Shielded Wirewound 10uH 20% 100KHz Ferrite 4.1A 32.5mΩ DCR T/R", Case/Package=Nonstandard, Current Rating=4.1A, DC Resistance (DCR)=32.5mR, Inductance Tolerance=20%, Max DC Current=4.7A, Max Operating Temperature=105°C, Min Operating Temperature=-25°C, Package Quantity=500, Resistor Type=Wirewound, Self Resonant Frequency=15MHz, Test Frequency=100kHz, Core Material=Ferrite, Halogen Free="Halogen Free", Height=5mm, Height - Seated (Max)=0.197inch, Inductance=10uH, Lead Free="Lead Free", Length=0.394inch, Mount="Surface Mount", Number of Pins=2, Packaging="Tape and Reel", RMS Current (Irms)=4.1A, RoHS Compliant=Yes, Saturation Current=4.7A, Series=NR, Shielding=Shielded, Termination=SMD/SMT, Tolerance=20%, Width=0.386inch
R1 R2 R3 R4 R5 R6 R7 R8 R9 R11 R12 R13 R14 R15 R16 R17 R18 R19 R22 R23 R24 R25 R26: library part CMP-1013-00746-1, "124K 0.125W 1% 0805 (2012 Metric)  SMD", Case-EIA=0805, Case-Metric=2012, Power="0.125 W", Tolerance="1 %", Technology=SMT
U1: library part CMP-0395-00359-2, "Single Output Fast Transient Response LDO, 1.5 A, Fixed 3.3 V Output, 2.1 to 20 V Input, 6-pin SOT-223 (DCQ), -40 to 125 degC, Green (RoHS & no Sb/Br)", Manufacturer="Texas Instruments", Accuracy(%)=1, ComponentLink1Description="Manufacturer URL", ComponentLink1URL=http://www.ti.com/, ComponentLink2Description=Datasheet, ComponentLink2URL=http://www.ti.com/general/docs/lit/getliterature.tsp?genericPartNumber=TPS7A4533&fileType=pdf, ComponentLink3Description="Package Specification", ComponentLink3URL=http://www.ti.com/litv/pdf/mpds098c, DatasheetVersion=SLVS720D, Eco-Plan="Green (RoHS & no Sb/Br)", Fixed Output Options(V)=3.3, Iout(Max)(A)=1.5, Iq(Typ)(mA)=1, Mounting Technology="Surface Mount", PackageDescription="6-Pin Plastic Small Outline, Body 3.5 x 6.5 mm, Pitch 1.27 mm", PackageReference=DCQ0006A, PackageVersion=4202109/D, PartNumber=TPS7A4533DCQT, SubFamily="Single Channel LDO", Vdo(Typ)(mV)=300, Vin(Max)(V)=20, Vin(Min)(V)=2.1, Vout Adj(Max)(V)=3.3, Vout Adj(Min)(V)=3.3

## Free pads (board coordinates)
  round 4.3 hole 3: 1(3.5,4) 1(4,69.5) 1(25,37.5) 1(56,69.5) 1(56.5,4)

## Via types
v1: diameter 0.6, hole 0.3, Top Layer to Bottom Layer, tented both sides, 881 vias
v2: diameter 0.4, hole 0.2, Top Layer to Bottom Layer, 60 vias
v3: diameter 0.6, hole 0.3, Top Layer to Bottom Layer, 27 vias
v4: diameter 0.6, hole 0.35, Top Layer to Bottom Layer, 22 vias
v5: diameter 1.27, hole 0.5, Top Layer to Bottom Layer, 9 vias
v6: diameter 1, hole 0.5, Top Layer to Bottom Layer, 8 vias

## Nets (pads, with @x,y where several pads share a name; then routed paths per layer and width w, separated by ;. In a path a pad name is that pad's centre, name@x,y a point inside that pad or via, vN(x,y) a via of type N, cw(c..) or ccw(c..) an arc to the next point about the centre after c; other vN are vias at no path point)
+3V3: C27.2 C29.2 J1.11 J1.12 U1.4 U1.5 | length 61.5
  Top Layer w0.7: v6(46.5,13) 46.557,13.057 46.557,13.607 47.45,14.5 C27.2
  Bottom Layer w0.7: v6@46.45,12.95 v6(46.5,13)
  Bottom Layer w1: J1.12 J1.11 27.4,10.24 ; 27.4,10.5 45.864,10.5 46.45,11.086 v6@46.45,12.95 ; 27.5,10.5 27.5,24.4 29.45,26.35 C29.2 29.4,35.8 29.4,38.845 29.48,38.925 29.48,39.475 U1.4 U1.5
+5V: C21.2 C22.2 C23.2 C28.2 J1.4 L5.2 R15.2 R25.1 U1.1 U1.2 | length 94.9
  Top Layer w0.3: v6(44.4,32.3) 47.4,32.3 R25.1
  Power w1.2: v5(17.4,32.4) 33.9,32.4 ; v5(34,39) 34,32.5 33.9,32.4 ; v6(44.4,32.3) 44.3,32.4 33.9,32.4
  Bottom Layer w0.3: C28.2@31.65,49.15 C28.2
  Bottom Layer w0.7: U1.1 33.44,39 v5(34,39)
  Bottom Layer w1: v6(4.1,18.8) 4.1,14.9 7.3,11.7 16.014,11.7 16.6,11.114 16.6,3.986 17.186,3.4 33.26,3.4 J1.4 ; U1.2 U1.1 33.44,49.05 33.34,49.15 C28.2
+15V: C8.2 C9.2 C10.2 J1.3 L2.2 R5.2 R22.1 | length 97.6
  Top Layer w0.3: J1.3 34.98,7.66 34.98,8.98 v6(35,9) ; v6(43.9,24.8) 44.089,24.8 44.439,25.15 46.975,25.15 47.45,25.625 R22.1
  Top Layer w2: v5(10,48) 10,51.64 L2.2
  Power w0.7: v6(35,9) 35.5,9.5 36,10 42.3,10 43.9,11.6 v6(43.9,24.8)
  Power w2: v5(10,48) 8.5,46.5 8.5,13.772 10.372,11.9 33.1,11.9 34.96,10.04 34.96,9 J1.3
+24V: B1.1 B1.20 B2.1 B2.20 C2.1 C3.1 C4.2 C5.2 C15.1 C16.1 C17.2 C18.2 D5.1 D6.1 D7.2 D8.2 L3.2 L6.2 R1.2 R2.1 R3.2 R11.2 R12.1 R13.2 R24.1 | length 135.4
  Top Layer w0.3: R11.2 24.819,30.194 v5(26.057,30.194) ; R24.1 47.5,22.45 47.5,21.176 47.776,20.9 v6(56.5,20.9)
  Top Layer w1: C3.1 28.15,57.25 v5(28.15,58.75) ; R12.1 33.075,22.625 33.075,22.5 34.227,22.5 34.427,22.3 v5(34.5,22.3) ; R2.1 33.85,52.4 36.427,52.4 36.627,52.2 v5(36.7,52.2)
  Power w1: v5(26.057,30.194) 26.109,30.143 26.296,30.143 26.338,30.1 39.186,30.1 39.586,30.5 45.514,30.5 46.1,31.086 46.1,34.3 ; v5(28.15,58.75) 28.2,58.8 35.914,58.8 36.7,58.014 v5(36.7,52.2) ; 33.914,30 34.5,29.414 v5(34.5,22.3) ; v6(56.5,20.9) v6(56.5,46)
  Power w1.5: v5(40.5,46.5) 46.1,40.9 46.1,34.3
  Bottom Layer w0.3: D6.1 43.569,39.869 D6.1@43.6,39.9 ; D8.2 55.025,46 v6(56.5,46)
  Bottom Layer w0.5: v5(36.7,52.2) 36.7,52.408 36.85,52.558 36.85,53.25 37.1,53.5 C18.2 C5.2
  Bottom Layer w1: v5(40.5,46.5) D5.1
  Bottom Layer w2: D6.1 D5.1 43.568,46.297 43.965,45.9 47.925,45.9 D7.2 48.2,46.175 49.231,46.175 50.185,47.129 52.815,47.129 53.769,46.175 54.8,46.175 D8.2
-5V: C19.1 C20.1 C24.1 D3.2 J1.8 R14.2 R26.1 | length 41.6
  Top Layer w1: J1.8 30.029,5.1 31.558,3.571 38.133,3.571 39.029,4.467 39.029,10.057 38,11.086 R14.2 ; C24.1 38.3,35.25 38.6,35.55 38.6,36.114 39.486,37 44.814,37 45.4,36.414 45.4,34.3 44.6,33.5 43.785,33.5 41.1,30.815 40.74,30.455 D3.2
-15V: C6.1 C7.1 C11.1 D1.2 J1.7 R4.2 R23.1 | length 114.3
  Top Layer w0.3: v6(45.5,29) R23.1
  Top Layer w2: v5(43.9,60.5) 43.95,60.55 R4.2
  Power w0.3: 48.5,29 48.6,29.1
  Power w1: v6(45.5,29) 48.5,29
  Power w2: J1.7 29.88,7.969 28.18,9.669 18.88,9.669 17.691,8.48 17.691,4.26 18.951,3 42.121,3 48.6,9.479 48.6,29.1 48.6,59.328 47.428,60.5 v5(43.9,60.5)
FB1_5V: B2.5 R15.1 R18.2 | length 31.2
  Top Layer w0.3: R18.2 R15.1 v3(5.9,21.8) ; v3(20.4,21.8) 20.4,21.847 20.933,22.38 21.804,22.38 B2.5
  Bottom Layer w0.5: v3(5.9,21.8) 5.9,16.193 6.193,15.9 20.107,15.9 20.4,16.193 v3(20.4,21.8)
FB1_15V: B1.5 R5.1 R8.2 | length 25
  Top Layer w0.3: R5.1@7.8,44.75 R8.2 10.204,44.746 v3(10.204,43) ; v3(20.164,51.901) 20.167,51.898 22.323,51.898 B1.5
  Bottom Layer w0.3: v3(10.204,43) 18.824,43 19,43.176 19,51.724 19.176,51.9 20.163,51.9 v3(20.164,51.901)
FB2_5V: B2.16 R14.1 R19.2 | length 36.1
  Top Layer w0.3: B2.16 27.696,22.38 28.874,22.38 29.154,22.1 v3(29.2,22.1) ; R14.1 R19.2 v3(42.7,19.3)
  Bottom Layer w0.3: v3(29.2,22.1) 29.281,22.1 29.526,22.345 30.755,22.345 32.6,20.5 32.6,12.276 32.776,12.1 42.524,12.1 42.7,12.276 v3(42.7,19.3)
FB2_15V: B1.16 R4.1 R9.2 | length 24.1
  Top Layer w0.3: B1.16 29.42,51.901 29.519,52 v3(29.6,52) ; v3(44.3,56) 45.95,56 R9.2 R4.1
  Bottom Layer w0.3: v3(29.6,52) 29.6,55.724 29.876,56 v3(44.3,56)
GND: B1.9 B1.10 B1.11 B1.12 B1.21 B2.9 B2.10 B2.11 B2.12 B2.21 C1.2 C2.2 C3.2 C4.1 C5.1 C6.2 C7.2 C8.1 C9.1 C10.1 C11.2 C12.2 C13.2 C14.2 C15.2 C16.2 C17.1 C18.1 C19.2 C20.2 C21.1 C22.1 C23.1 C24.2 C25.2 C26.2 C27.1 C28.1 C29.1 D2.2 D4.2 D7.1 D8.1 D9.1 D10.2 D11.1 D12.1 D13.2 J1.1 J1.2 J1.5 J1.6 J1.9 J1.10 J1.13 J1.14 J2.2 L1.2 L4.2 pad.1 R6.1 R7.1 R8.1 R9.1 R16.1 R17.1 R18.1 R19.1 U1.3 U1.6 | length 23.6
  Top Layer w0.7: R6.1 10.8,58.6 11.69,58.6 12.1,58.19 v3(12.1,57.7) ; C20.2 38.45,32 41.7,35.25 C24.2
  Bottom Layer w0.7: C18.1 C5.1 46.95,50.5 48,49.45 D7.1
  other v1: 3,1 4,1 5,1 6,1 7,1 8,1 9,1 10,1 11,1 12,1 13,1 14,1 15,1 16,1 17,1 18,1 19,1 20,1 21,1 22,1 23,1 24,1 25,1 26,1 27,1 28,1 29,1 30,1 31,1 32,1 33,1 34,1 35,1 36,1 37,1 38,1 39,1 40,1 41,1 42,1 43,1 44,1 45,1 46,1 47,1 48,1 49,1 50,1 51,1 52,1 53,1 54,1 55,1 56,1 6,2 7,2 8,2 9,2 10,2 11,2 12,2 13,2 14,2 15,2 16,2 17,2 44,2 45,2 46,2 47,2 48,2 49,2 50,2 51,2 52,2 53,2 54,2 1,3 6,3 7,3 8,3 9,3 10,3 11,3 12,3 13,3 14,3 15,3 16,3 45,3 46,3 47,3 48,3 49,3 50,3 51,3 52,3 53,3 54,3 59,3 7,4 8,4 9,4 10,4 11,4 12,4 13,4 14,4 15,4 46,4 47,4 48,4 49,4 50,4 51,4 52,4 53,4 1,5 6,5 7,5 8,5 9,5 10,5 11,5 12,5 13,5 14,5 15,5 41,5 42,5 47,5 48,5 49,5 50,5 51,5 52,5 53,5 54,5 59,5 1,6 6,6 7,6 8,6 9,6 10,6 11,6 12,6 13,6 14,6 15,6 21,6 26,6 31,6 36,6 41,6 42,6 43,6 48,6 49,6 50,6 51,6 52,6 53,6 54,6 59,6 1,7 2,7 3,7 4,7 5,7 6,7 7,7 8,7 9,7 10,7 11,7 12,7 13,7 14,7 15,7 21,7 41,7 42,7 43,7 44,7 49,7 50,7 51,7 52,7 53,7 54,7 55,7 56,7 57,7 58,7 59,7 1,8 2,8 3,8 4,8 5,8 6,8 7,8 8,8 9,8 10,8 11,8 12,8 13,8 14,8 15,8 41,8 42,8 43,8 44,8 45,8 50,8 51,8 52,8 53,8 54,8 55,8 56,8 57,8 58,8 59,8 1,9 2,9 3,9 4,9 5,9 6,9 7,9 8,9 9,9 10,9 11,9 12,9 13,9 14,9 15,9 51,9 52,9 53,9 54,9 55,9 56,9 57,9 58,9 59,9 1,10 2,10 3,10 4,10 5,10 6,10 7,10 8,10 9,10 10,10 11,10 12,10 13,10 14,10 15,10 51,10 52,10 53,10 54,10 55,10 56,10 57,10 58,10 59,10 1,11 2,11 3,11 4,11 5,11 6,11 51,11 52,11 53,11 54,11 55,11 56,11 57,11 58,11 59,11 1,12 2,12 3,12 4,12 5,12 51,12 52,12 53,12 54,12 55,12 56,12 57,12 58,12 59,12 1,13 2,13 3,13 4,13 40,13 41,13 51,13 52,13 53,13 54,13 55,13 56,13 57,13 58,13 59,13 1,14 2,14 3,14 7,14 11,14 12,14 13,14 41,14 51,14 52,14 53,14 54,14 55,14 56,14 57,14 58,14 59,14 1,15 2,15 10,15 11,15 20,15 21,15 41,15 51,15 52,15 53,15 54,15 55,15 56,15 57,15 58,15 59,15 1,16 2,16 41,16 45,16 46,16 47,16 51,16 52,16 53,16 54,16 55,16 56,16 57,16 58,16 59,16 1,17 2,17 45,17 46,17 47,17 51,17 52,17 53,17 54,17 55,17 56,17 57,17 58,17 59,17 1,18 2,18 51,18 52,18 53,18 54,18 55,18 56,18 57,18 58,18 59,18 1,19 2,19 25,19 51,19 52,19 53,19 54,19 55,19 56,19 57,19 58,19 59,19 1,20 2,20 51,20 52,20 53,20 54,20 55,20 56,20 57,20 58,20 59,20 1,21 2,21 58,21 59,21 1,22 2,22 58,22 59,22 1,23 2,23 58,23 59,23 1,24 2,24 51,24 52,24 53,24 54,24 55,24 58,24 59,24 1,25 2,25 3,25 58,25 59,25 1,26 2,26 3,26 58,26 59,26 1,27 2,27 51,27 52,27 53,27 54,27 55,27 58,27 59,27 1,28 2,28 32,28 33,28 55,28 58,28 59,28 1,29 2,29 58,29 59,29 1,30 2,30 55,30 58,30 59,30 1,31 2,31 51,31 52,31 53,31 54,31 55,31 58,31 59,31 1,32 2,32 58,32 59,32 1,33 2,33 58,33 59,33 1,34 2,34 20,34 21,34 58,34 59,34 1,35 2,35 20,35 21,35 58,35 59,35 1,36 2,36 20,36 21,36 58,36 59,36 1,37 2,37 3,37 4,37 5,37 6,37 7,37 10,37 11,37 12,37 13,37 14,37 18,37 19,37 20,37 21,37 58,37 59,37 1,38 2,38 3,38 4,38 5,38 6,38 7,38 10,38 11,38 12,38 13,38 14,38 15,38 16,38 17,38 18,38 19,38 20,38 21,38 58,38 59,38 1,39 2,39 3,39 4,39 5,39 6,39 7,39 19,39 20,39 21,39 58,39 59,39 1,40 2,40 3,40 4,40 5,40 6,40 7,40 20,40 21,40 58,40 59,40 1,41 2,41 3,41 4,41 5,41 6,41 7,41 10,41 11,41 12,41 13,41 14,41 21,41 58,41 59,41 1,42 2,42 3,42 4,42 5,42 6,42 7,42 11,42 12,42 13,42 14,42 15,42 30,42 31,42 32,42 58,42 59,42 1,43 2,43 3,43 4,43 5,43 6,43 7,43 24,43 25,43 26,43 30,43 31,43 58,43 59,43 1,44 2,44 3,44 4,44 5,44 6,44 17,44 24,44 25,44 26,44 30,44 58,44 59,44 1,45 2,45 3,45 4,45 5,45 6,45 17,45 23,45 24,45 25,45 26,45 27,45 28,45 58,45 59,45 1,46 2,46 24,46 25,46 26,46 58,46 59,46 1,47 2,47 24,47 25,47 26,47 58,47 59,47 1,48 2,48 24,48 25,48 26,48 58,48 59,48 1,49 2,49 58,49 59,49 1,50 2,50 58,50 59,50 1,51 2,51 58,51 59,51 1,52 2,52 58,52 59,52 1,53 2,53 58,53 59,53 1,54 2,54 58,54 59,54 1,55 2,55 44,55 58,55 59,55 1,56 2,56 58,56 59,56 1,57 2,57 58,57 59,57 1,58 2,58 58,58 59,58 1,59 2,59 58,59 59,59 1,60 2,60 58,60 59,60 1,61 2,61 24,61 25,61 26,61 30,61 58,61 59,61 1,62 2,62 22,62 23,62 24,62 25,62 26,62 27,62 28,62 29,62 30,62 31,62 34,62 38,62 58,62 59,62 1,63 2,63 10,63 13,63 14,63 15,63 16,63 17,63 18,63 19,63 20,63 21,63 22,63 23,63 24,63 27,63 28,63 29,63 30,63 31,63 34,63 37,63 38,63 39,63 40,63 41,63 42,63 43,63 44,63 45,63 58,63 59,63 1,64 2,64 14,64 15,64 16,64 17,64 18,64 19,64 20,64 21,64 22,64 23,64 24,64 27,64 28,64 29,64 43,64 44,64 45,64 57,64 58,64 59,64 1,65 2,65 19,65 20,65 21,65 22,65 23,65 24,65 27,65 28,65 29,65 57,65 58,65 59,65 1,66 2,66 19,66 20,66 21,66 22,66 23,66 24,66 27,66 28,66 29,66 57,66 58,66 59,66 1,67 2,67 57,67 58,67 59,67 1,68 59,68 1,69 59,69 1,70 59,70 3,72 5,72 6,72 7,72 8,72 9,72 10,72 11,72 12,72 13,72 14,72 15,72 16,72 17,72 18,72 19,72 20,72 21,72 22,72 23,72 24,72 25,72 26,72 27,72 28,72 29,72 30,72 31,72 32,72 33,72 34,72 35,72 36,72 37,72 38,72 39,72 40,72 41,72 42,72 43,72 44,72 45,72 46,72 47,72 48,72 49,72 50,72 51,72 52,72 53,72 54,72 55,72 57,72
  other v2: 3.49,2.204 56.49,2.204 4.389,2.439 57.389,2.439 2.593,2.45 55.593,2.45 5.05,3.093 58.05,3.093 1.939,3.111 54.939,3.111 5.296,3.99 58.296,3.99 1.704,4.01 54.704,4.01 1.95,4.907 5.061,4.889 54.95,4.907 58.061,4.889 2.611,5.561 4.407,5.55 55.611,5.561 57.407,5.55 3.51,5.796 56.51,5.796 24.99,35.704 24.093,35.95 25.889,35.939 23.439,36.611 26.55,36.593 26.796,37.49 23.204,37.51 26.561,38.389 23.45,38.407 24.111,39.061 25.907,39.05 25.01,39.296 3.99,67.704 55.99,67.704 3.093,67.95 4.889,67.939 55.093,67.95 56.889,67.939 2.439,68.611 5.55,68.593 54.439,68.611 57.55,68.593 5.796,69.49 57.796,69.49 2.204,69.51 54.204,69.51 5.561,70.389 57.561,70.389 2.45,70.407 54.45,70.407 4.907,71.05 56.907,71.05 3.111,71.061 55.111,71.061 4.01,71.296 56.01,71.296
  other v3: 22.9,18.5
  other v4: 37,13.2 14.3,13.4 29.2,16 26.1,18.8 42.7,20.1 29.9,20.8 29.9,21.6 19.6,21.8 5.9,22.6 19.6,23 25.6,26.5 15,41 10,42 13.8,45.4 29.5,47.7 27.311,48.483 20.1,50 20.1,51 30.4,52.35 20.1,54.4 44.8,55.2 7,57.6
NetB1_2: B1.2 D2.1 L2.1
NetB1_3: B1.3 B1.14 B1.18 C1.1 | length 54.5
  Top Layer w0.3: v3(13.8,44.5) C1.1 ; v3(19.968,53.611) 20,53.579 20,52.876 20.176,52.7 21,52.7 21.426,53.126 B1.3@22.25,53.126 ; v3(26.876,49.154) 26.876,49.236 27.046,49.406 27.046,50.604 ; B1.18@28.154,53.18 27.283,53.18 27.046,52.943 27.046,50.604 ; B1.14 28.172,50.604 27.046,50.604
  Bottom Layer w0.5: v3(13.8,44.5) 8.693,44.5 8.4,44.207 8.4,39.989 8.693,39.696 18.096,39.696 21.6,43.2 21.6,48.861 21.893,49.154 23.5,49.154 ; v3(19.968,53.611) 23.096,53.611 23.5,53.207 23.5,49.154 ; v3(26.876,49.154) 23.5,49.154
NetB1_4: B1.4 R1.1 | length 6.4
  Top Layer w0.3: B1.4@22.346,52.572 23.217,52.572 23.476,52.83 23.476,53.916 25.25,55.69 R1.1
NetB1_6: B1.6 R3.1 R6.2 | length 26.1
  Top Layer w0.3: v3(7,58.5) R6.2 R3.1 ; v3(20.952,51.179) 20.988,51.215 B1.6@22.289,51.215
  Bottom Layer w0.3: v3(7,58.5) 18.424,58.5 18.6,58.324 18.6,52.727 18.776,52.551 20.649,52.551 20.933,52.267 20.933,51.198 v3(20.952,51.179)
NetB1_7: B1.7 R7.2 | length 16
  Top Layer w0.3: v3(16.2,40.5) R7.2 ; v3(20.955,50.379) 21.036,50.379 21.183,50.526 B1.7@22.25,50.526
  Bottom Layer w0.3: v3(16.2,40.5) 18,40.5 20.955,43.455 v3(20.955,50.379)
NetB1_8: B1.8 C12.1 | length 5.6
  Top Layer w0.3: B1.8@22.304,49.93 21.433,49.93 21,49.497 21,47 21.35,46.65 C12.1
NetB1_13: B1.13 L3.1
NetB1_15: B1.15 C13.1 | length 8.9
  Top Layer w0.3: C13.1 29.421,46.65 v3(30.3,47.529) ; B1.15 29.952,51.251 30.234,51.533 v3(30.315,51.533)
  Ground w0.3: v3(30.3,47.529) v3@30.308,47.537 ; v3@30.308,51.526 v3(30.315,51.533)
  Bottom Layer w0.3: v3@30.308,47.537 v3@30.308,51.526
NetB1_17: B1.17 R2.2 | length 3.8
  Top Layer w0.3: B1.17@28.196,52.572 29.176,52.572 29.604,53 31.175,53 31.45,52.725 R2.2@31.45,52.5
NetB1_19: B1.19 D1.1 L1.1
NetB2_2: B2.2 D4.1 L5.1
NetB2_3: B2.3 B2.14 B2.18 C14.1 | length 32.1
  Top Layer w0.3: B2.3 21.846,23.722 22.717,23.722 22.965,23.969 22.965,24.162 23.213,24.41 26.287,24.41 26.535,24.162 26.535,23.969 26.783,23.722 27.654,23.722 B2.18 ; B2.14 27.654,21.122 26.783,21.122 26.546,21.358 26.546,23.443 26.783,23.68 27.654,23.68 B2.18 ; v3(29.2,23.755) 29.167,23.722 27.696,23.722 B2.18 ; C14.1 35.675,12.7 36.179,13.204 v3(36.2,13.204)
  Bottom Layer w0.3: v3(29.2,23.755) 29.245,23.8 36.024,23.8 36.2,23.624 v3(36.2,13.204)
NetB2_4: B2.4 R11.1 | length 10.9
  Top Layer w0.3: v3(20.4,23) 20.43,23.03 21.804,23.03 B2.4 ; v3(24.75,26.5) R11.1
  Bottom Layer w0.3: v3(20.4,23) 20.4,26.324 20.576,26.5 v3(24.75,26.5)
NetB2_6: B2.6 R13.1 R16.2 | length 25.3
  Top Layer w0.3: v3(14.3,14.2) R16.2 ; B2.6 21.846,21.73 22.717,21.73 22.976,21.471 22.976,19.824 24.75,18.05 24.75,18 ; R13.1 24.75,18 ; v3(26.1,18) 24.75,18
  Bottom Layer w0.3: v3(14.3,14.2) 25.924,14.2 26.1,14.376 v3(26.1,18)
NetB2_7: B2.7 R17.2 | length 8.2
  Top Layer w0.3: R17.2 19.624,15.75 20.142,16.268 20.142,20.423 20.799,21.08 21.804,21.08 B2.7
NetB2_8: B2.8 C25.1 | length 5.3
  Top Layer w0.3: B2.8 21.804,20.43 20.933,20.43 20.696,20.193 20.696,18.758 21.163,18.292 21.533,18.292 22,17.825 C25.1
NetB2_13: B2.13 L6.1
NetB2_15: B2.15 C26.1 | length 7.8
  Top Layer w0.3: C26.1 v3(29.2,16.9) ; B2.15 27.75,21.676 28.643,21.676 29.119,21.2 v3(29.2,21.2)
  Bottom Layer w0.3: v3(29.2,16.9) v3(29.2,21.2)
NetB2_17: B2.17 R12.2 | length 2.9
  Top Layer w0.3: B2.17 29.245,23.051 29.546,22.75 R12.2@30.45,22.75
NetB2_19: B2.19 D3.1 L4.1
NetD5_2: D5.2 D6.2 F1.2 F2.2 | length 25.9
  Bottom Layer w2: D5.2 D6.2 36.431,39.242 41.507,34.167 51.317,34.167 51.35,34.2 F2.2
NetD9_2: D9.2 R22.2 | length 2.4
  Top Layer w0.7: R22.2 D9.2
NetD10_1: D10.1 R23.2 | length 2.4
  Top Layer w0.7: R23.2 D10.1
NetD11_2: D11.2 R24.2 | length 2.4
  Top Layer w0.7: R24.2 D11.2
NetD12_2: D12.2 R25.2 | length 2.4
  Top Layer w0.7: R25.2 D12.2
NetD13_1: D13.1 R26.2 | length 2.4
  Top Layer w0.7: R26.2 D13.1
NetF1_1: F1.1 F2.1 J2.1 | length 11.3
  Bottom Layer w1: F1.1 48.445,36.834 48.516,36.905 48.516,37.966 51.35,40.8 51.625,40.8 F2.1
  Bottom Layer w2: J2.1 51.625,44.625 F2.1@51.625,40.8
pads on no net: J1.15 J1.16

## Polygon pours and split planes (outlines as drawn)
GND on Top Layer "GND_L01_P326" (solid, remove dead copper, pour order 326): 0,73 60,73 60,0 0,0
-5V on Top Layer "-5V_L01_P006" (solid, pour order 6): 27.5,33 33.5,33 34,32.5 34,27.5 34.5,27 42.25,27 43,26.25 43,23.5 42.25,22.75 37.25,22.75 36.759,22.259 36.759,13.75 39,13.75 39.5,14.25 39.5,18 46.5,18 47.7,19.2 47.7,38.1 46.5,39.3 29.2,39.3 27.5,37.6
+15V on Top Layer "+15V_L01_P002" (solid, remove dead copper, pour order 2): 2.75,71.2 30.5,71.2 30.5,67.6 29.9,67 13.5,67 13.5,64.5 7.5,64.5 7.5,62 7.5,57.5 13.5,57.5 13.5,46 3.5,46 2.75,46.75
NetB1_2 on Top Layer "NETB1_2_L01_P010" (solid, remove dead copper, pour order 10): 13.5,46 20.5,46 20.5,53 22.325,53 22.325,54.075 21.1,55.3 20.5,55.3 20.5,59.75 19.75,60.5 14.25,60.5 13.5,59.75
+5V on Top Layer "+5V_L01_P007" (solid, pour order 7): 3,24 5.25,24 5.25,26.75 3,26.75 2.7,27.05 2.7,35.2 3,35.5 19,35.5 19,32 18.5,31.5 13.5,31.5 13.5,19.7 19.3,19.7 19.7,19.3 19.7,16.7 18.75,15.75 3,15.75 2.7,16.05 2.7,23.7
NetB2_2 on Top Layer "NETB2_2_L01_P016" (solid, remove dead copper, pour order 16): 20,19.5 20,23.5 22,23.5 22,25 20.5,25 20.5,32 12.5,32 12.5,21.5 12.5,19.5
+24V on Top Layer "Top Layer-+24V" (solid, pour order 8): 27.5,14.5 30,14.5 30,13 36.5,13 36.5,23.5 31.5,23.5 31.5,21.5 36,21.5 36,18 29,18 29,17 23,17 23,13 27.5,13
NetB2_19 on Top Layer "NETB2_19_L01_P009" (solid, pour order 9): 27.5,24.83 29,24.83 29,26.7 42.3,26.7 43,26 43,24 42.1,23.1 27.5,23.1
NetB2_13 on Top Layer "NETB2_13_L01_P018" (solid, remove dead copper, pour order 18): 36,21.25 36,18 29.25,18 28.5,18.75 28.5,20 27.5,20 27.5,21.25
+24V on Top Layer "+24V_L01_P017" (solid, remove dead copper, pour order 17): 20.5,24.5 29,24.5 29,31 20.5,31
-15V on Top Layer "-15V_L01_P003" (solid, pour order 3): 50,60 50,63 54.75,63 56,64.25 56,71.2 30.1,71.2 30.1,64 42,64 42,66.75 42.75,67.5 46,67.5 46.6,66.9 46.6,62.638 45.962,62 39,62 38.5,61.5 38.5,58 39,57.5 44,57.5 44.5,58 44.5,59.5 49.5,59.5
+24V on Top Layer "+24V_L01_P013" (solid, pour order 13): 44.3,43.3 57.25,43.3 57.25,48.25 56.5,49 53,49 52,48 52,47 51.7,46.7 43.75,46.7 43.75,48.8 48.8,48.8 49.5,49.5 51,51 56.5,51 57.2,51.7 57.2,63 49.5,63 49.5,57.1 52.2,57.1 52.2,54.5 47.004,54.496 47.004,53.5 32.5,53.5 32.5,51 37.5,51 37.5,47.5 31,47.5 31,44 31.7,43.3
NetB1_19 on Top Layer "NETB1_19_L01_P004" (solid, pour order 4): 28,52.5 28,54 30,54 30,56.5 43.5,56.5 43.5,53.5 31,53.5 31,52.5
+24V on Top Layer "+24V_L01_P012" (solid, pour order 12): 19.75,60.5 14.5,60.5 13.5,59.5 10,59.5 10,62 14.5,62 20.75,62 22.25,60.5 22.25,60 30,60 30,54 20.5,54 20.5,59.75
NetB1_13 on Top Layer "NETB1_13_L01_P011" (solid, pour order 11): 28,51 37.5,51 37.5,47.5 28,47.5
GND on Ground "GND_L02_P307" (solid, remove dead copper, pour order 307): -0.038,74 60,74 60,0 -0.101,0
GND on Bottom Layer "GND_L04_P325" (solid, remove dead copper, pour order 325): 0,73 61,73 60,72 60,0 0,0
+3V3 on Bottom Layer "+3V3_L04_P324" (solid, remove dead copper, pour order 324): 22,41.5 29,41.5 31,39.5 31,26.5 29,24.5 29,14.5 47,14.5 47.5,14 47.5,10 47,9.5 29,9.5 27,7.5 23,7.5 23,8 22,9 22,11.5
NetF1_1 on Bottom Layer "NETF1_1_L04_P322" (solid, remove dead copper, pour order 322): 45,35.5 56.5,35.5 56.5,46.5 45,46.5
+24V on Bottom Layer "+24V_L04_P321" (solid, remove dead copper, pour order 321): 49.5,44.5 46.5,44.5 45.5,43.5 45.5,36.5 45,36 39.5,36 39.5,48 38.5,49 35,49 35,54 35.5,54.5 43.5,54.5 44,54 44,51.5 45.5,50 56.5,50 56.5,45 53.5,45 52.5,46 50.5,46 49.5,45
NetD5_2 on Bottom Layer "NETD5_2_L04_P320" (solid, remove dead copper, pour order 320): 35,49 38.5,49 39.5,48 39.5,38 41.5,36 56,36 56.5,35.5 56.5,32.5 56,32 50,32 49,33 36,33 35,34
GND on Bottom Layer "Bottom Layer-GND" (solid, remove dead copper, pour order 319): 18.6,49.8 19.2,49.2 23.454,49.2 23.5,49.154 23.9,49.554 23.9,59.6 23.2,60.3 6.4,60.3 5.6,59.5 5.6,57 6,56.6 18.1,56.6 18.7,56 18.7,55.2 18.6,55.2
GND on Bottom Layer "GND_L04_P317" (solid, remove dead copper, pour order 317): 33.9,23.3 36.3,20.9 41.2,20.9 41.6,21.3 43.5,21.3 43.9,20.9 43.9,12.5 42.9,11.5 31.5,11.5 30.6,12.4 7.4,12.4 4.7,15.1 4.7,19.3 4.25,19.75 4.25,23.85 4.55,24.15 6.75,24.15 7.1,23.8 7.1,21.8 7.7,21.2 18.2,21.2 18.8,21.8 18.8,26.3 20,27.5 25.5,27.5 26.9,26.1 26.9,23.3
GND on Bottom Layer "GND_L04_P316" (solid, remove dead copper, pour order 316): 47.75,54.75 47.75,58.75 47.25,59.25 38.25,59.25 37.75,58.75 37.75,54.75 38.25,54.25 47.25,54.25
GND on Bottom Layer "GND_L04_P315" (solid, remove dead copper, pour order 315): 28.25,54.25 34.75,54.25 34.75,51.5 34.25,51 28.75,51 28.25,51.5
GND on Bottom Layer "GND_L04_P314" (solid, remove dead copper, pour order 314): 25.9,50 25.9,46.4 26.2,46.1 31.3,46.1 31.9,46.7 31.9,50.5 26.5,50.5
GND on Bottom Layer "GND_L04_P312" (solid, pour order 312): 9.3,45.8 16.3,45.8 17.1,45 17.1,40.4 16.6,39.9 9.7,39.9 8.5,41.1 8.5,45
+5V on Power "+5V_L03_P328" (solid, remove dead copper, pour order 328): 16,31.6 44.8,31.6 45.5,32.3 45.5,40.5 27.5,40.5 23.5,36.5 16,36.5
+24V on Power "+24V_L03_P327" (solid, remove dead copper, pour order 327): 47,30.5 45.25,28.75 39.75,28.75 37,26 37,21.5 32.5,21.5 31.25,22.75 31.25,25 29.25,27 25.25,27 24,28.25 24,31.25 45.25,31.25 45.5,31.5 45.5,32.888 44.888,33.5 43.5,33.5 40.5,36.5 40.5,43.5 34,50 34,54 32,56 25.5,56 25.5,60 39.5,60 42,57.5 42,51.5 47,46.5

## Silkscreen, mask and mechanical layers (free items; w line width, h text height)
Top Overlay:
  text "+24V        GND" at 59.333,42.138 h1.25 r90
  text "-5V PWR" at 55.727,35.154 h0.7
  text "+5V PWR" at 55.727,31.881 h0.7
  text "-15V PWR" at 55.727,28.608 h0.7
  text "+15V PWR" at 55.727,25.334 h0.7
  text "+24V PWR" at 55.727,22.064 h0.7
  text "Placa de Alimentación / Generador de Funciones / Zuliani, Agustín / V01.R00" at 0.6,7.248 h1.25
Bottom Overlay:
  text "Placa de Alimentación / Generador de Funciones / Zuliani, Agustín / V01.R00" at 8.307,20.977 h1.25 r270
  text "GND" at 21.828,8.6 h1 r270
  text "+3V3" at 24.372,8.6 h1 r270
  text "GND" at 26.908,8.6 h1 r270
  text "-15V" at 29.452,8.6 h1 r270
  text "GND" at 31.988,8.6 h1 r270
  text "+15V" at 34.532,8.6 h1 r270
  text "GND" at 37.068,8.6 h1 r270
  text "GND" at 21.828,1.2 h1 r270
  text "+3V3" at 24.372,1.2 h1 r270
  text "GND" at 26.908,1.2 h1 r270
  text "-5V" at 29.454,1.2 h1 r270
  text "GND" at 31.988,1.2 h1 r270
  text "+5V" at 34.534,1.2 h1 r270
  text "GND" at 37.068,1.2 h1 r270
Mechanical 1:
  the board outline again, w0.254